# Altium PCB PCB_RAM_MUX4.PcbDoc
Units mil, origin at the board's own origin, x right, y up, seen from the top; angles counter-clockwise.
Board outline 3440 x 3440 mil, 4 copper layers (Top Signal, PWR, GND, Bottom Signal), stack 23.756 mil thick; 58 components, 70 nets, 308 pads, 107 vias.
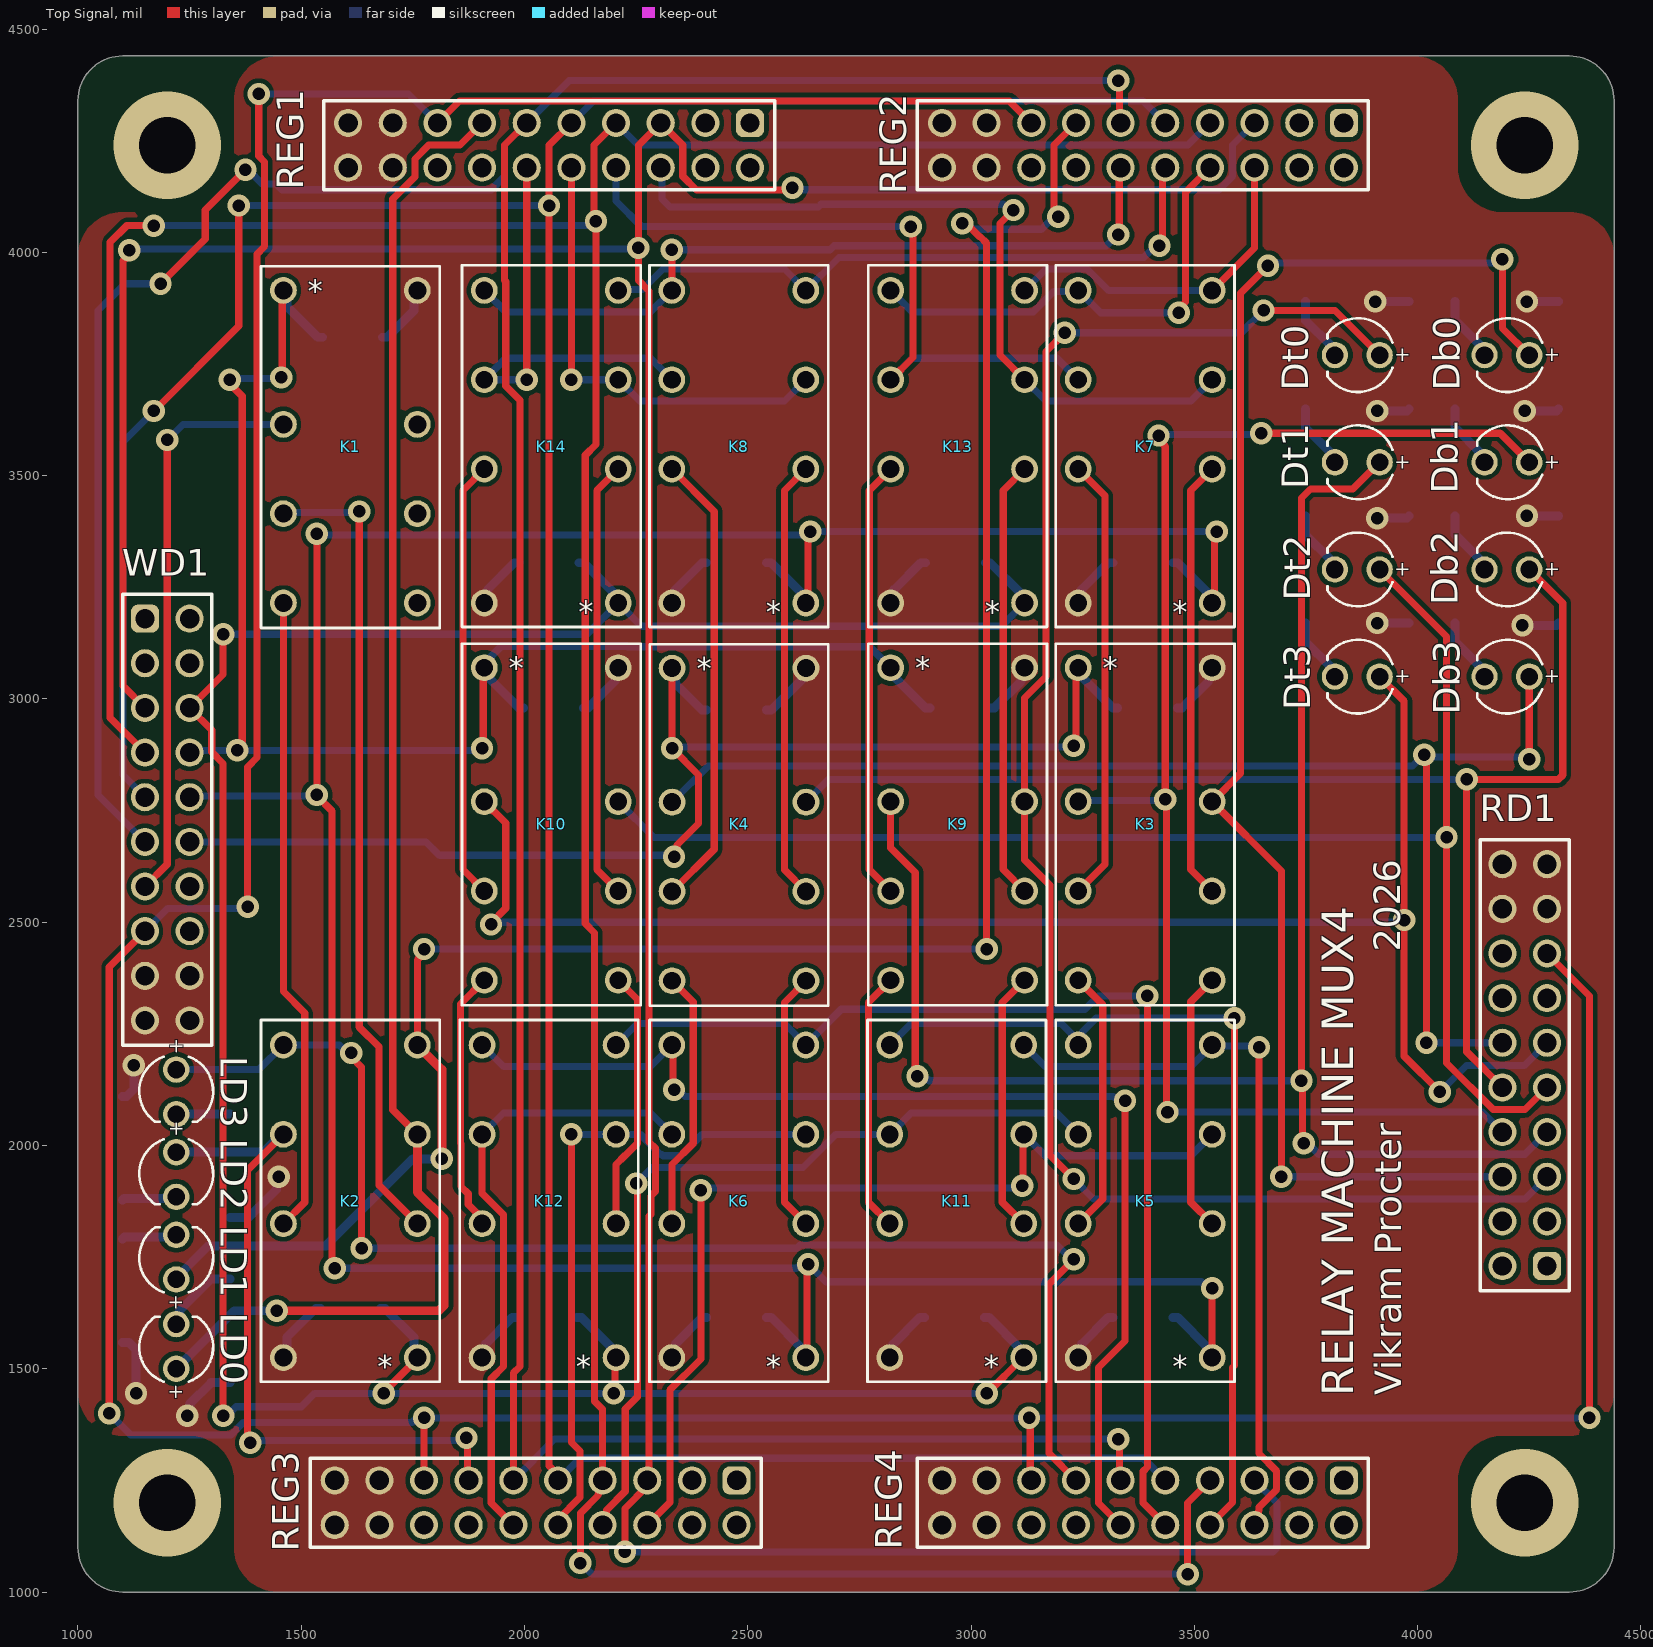
[diagram p0: Top Signal view]
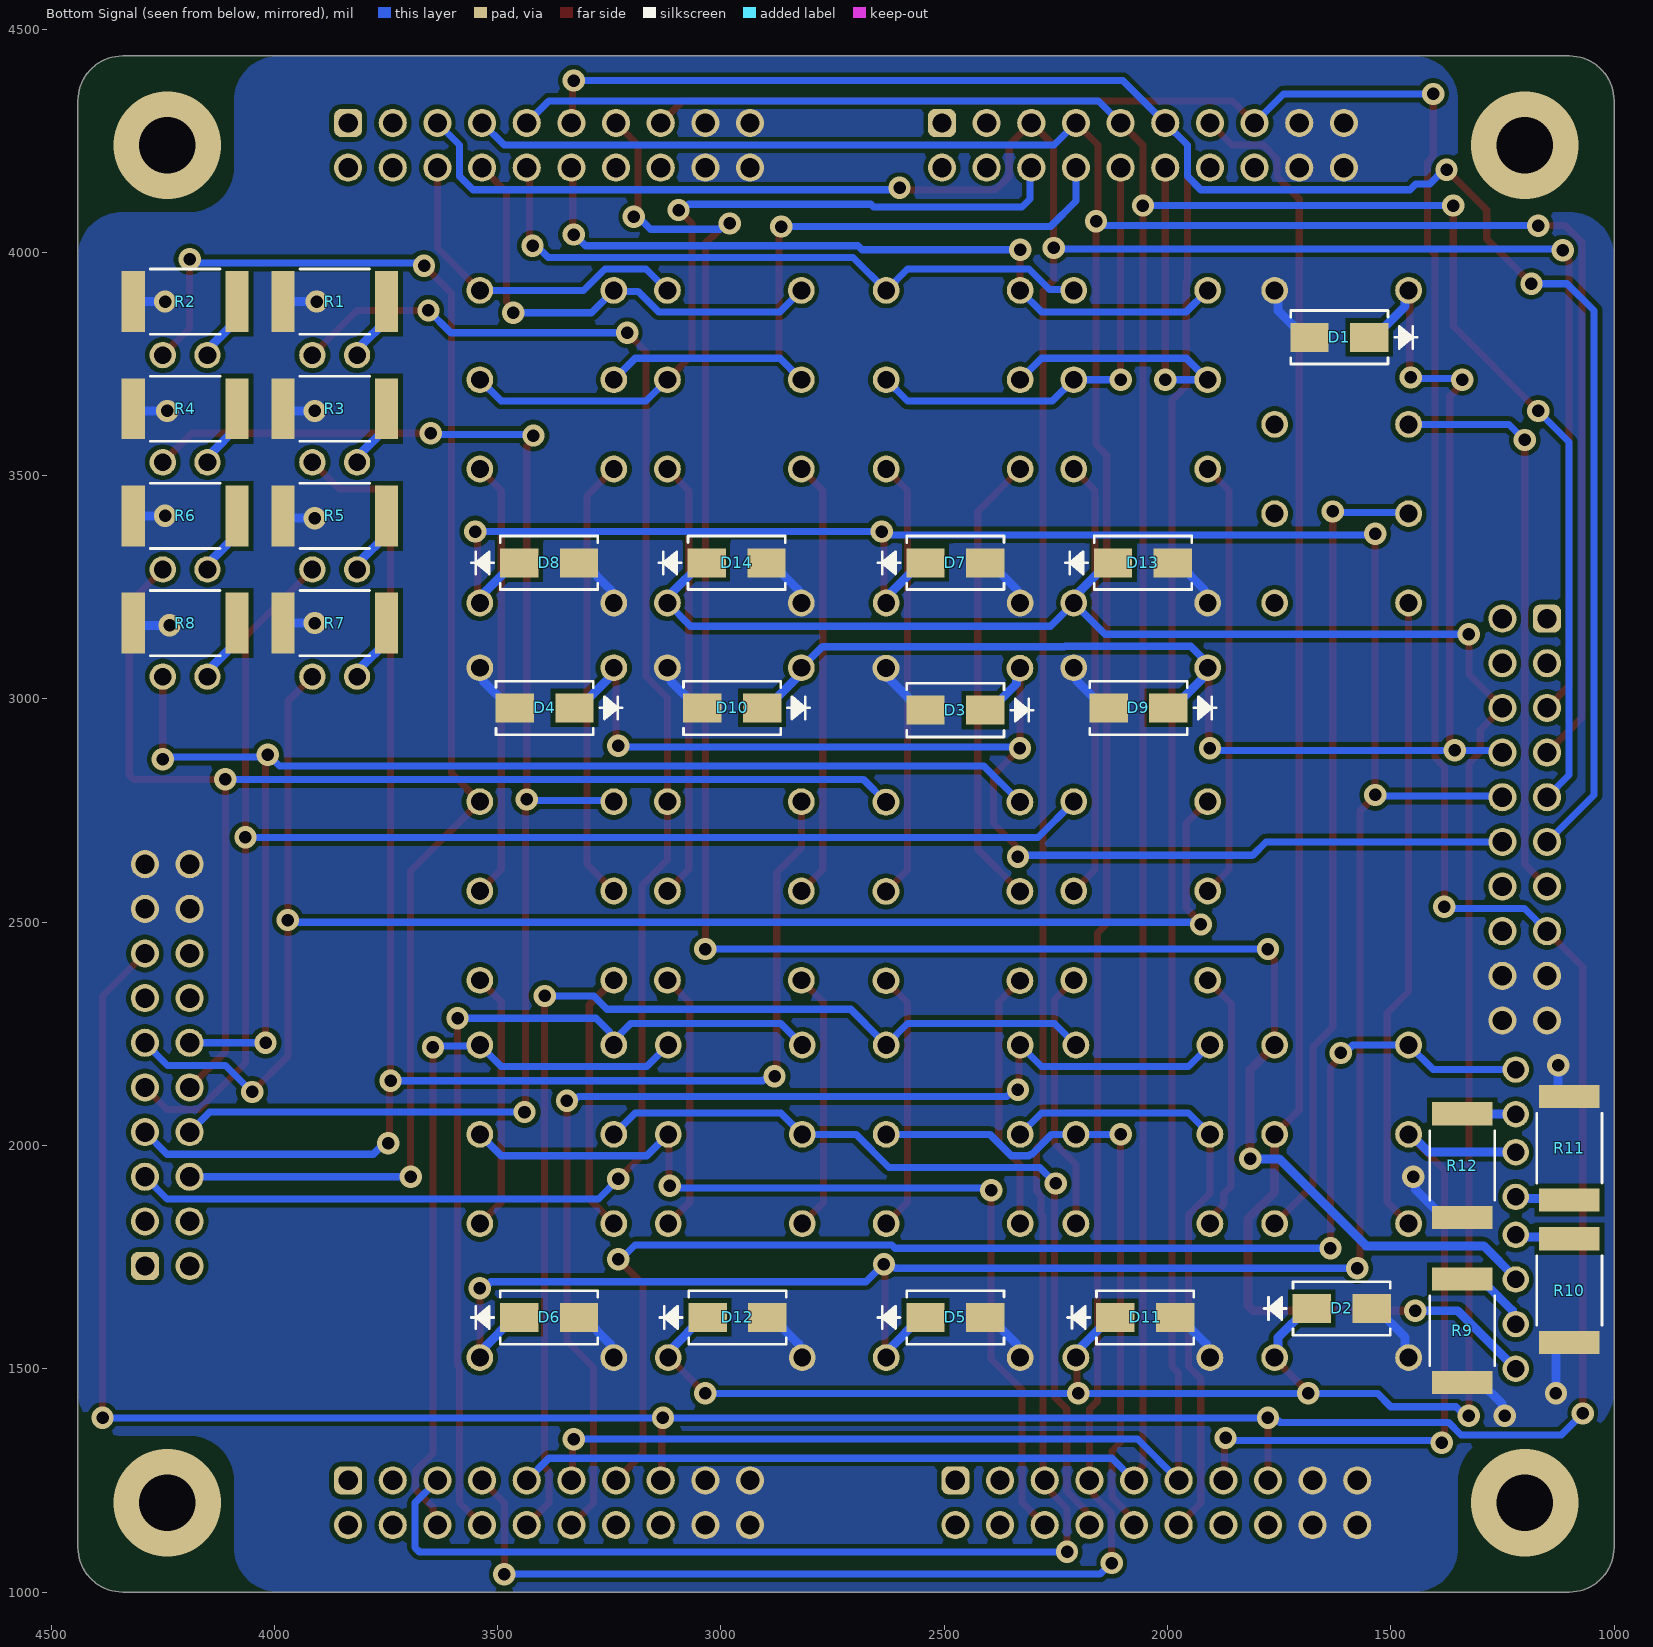
[diagram p1: Bottom Signal view, seen from below]
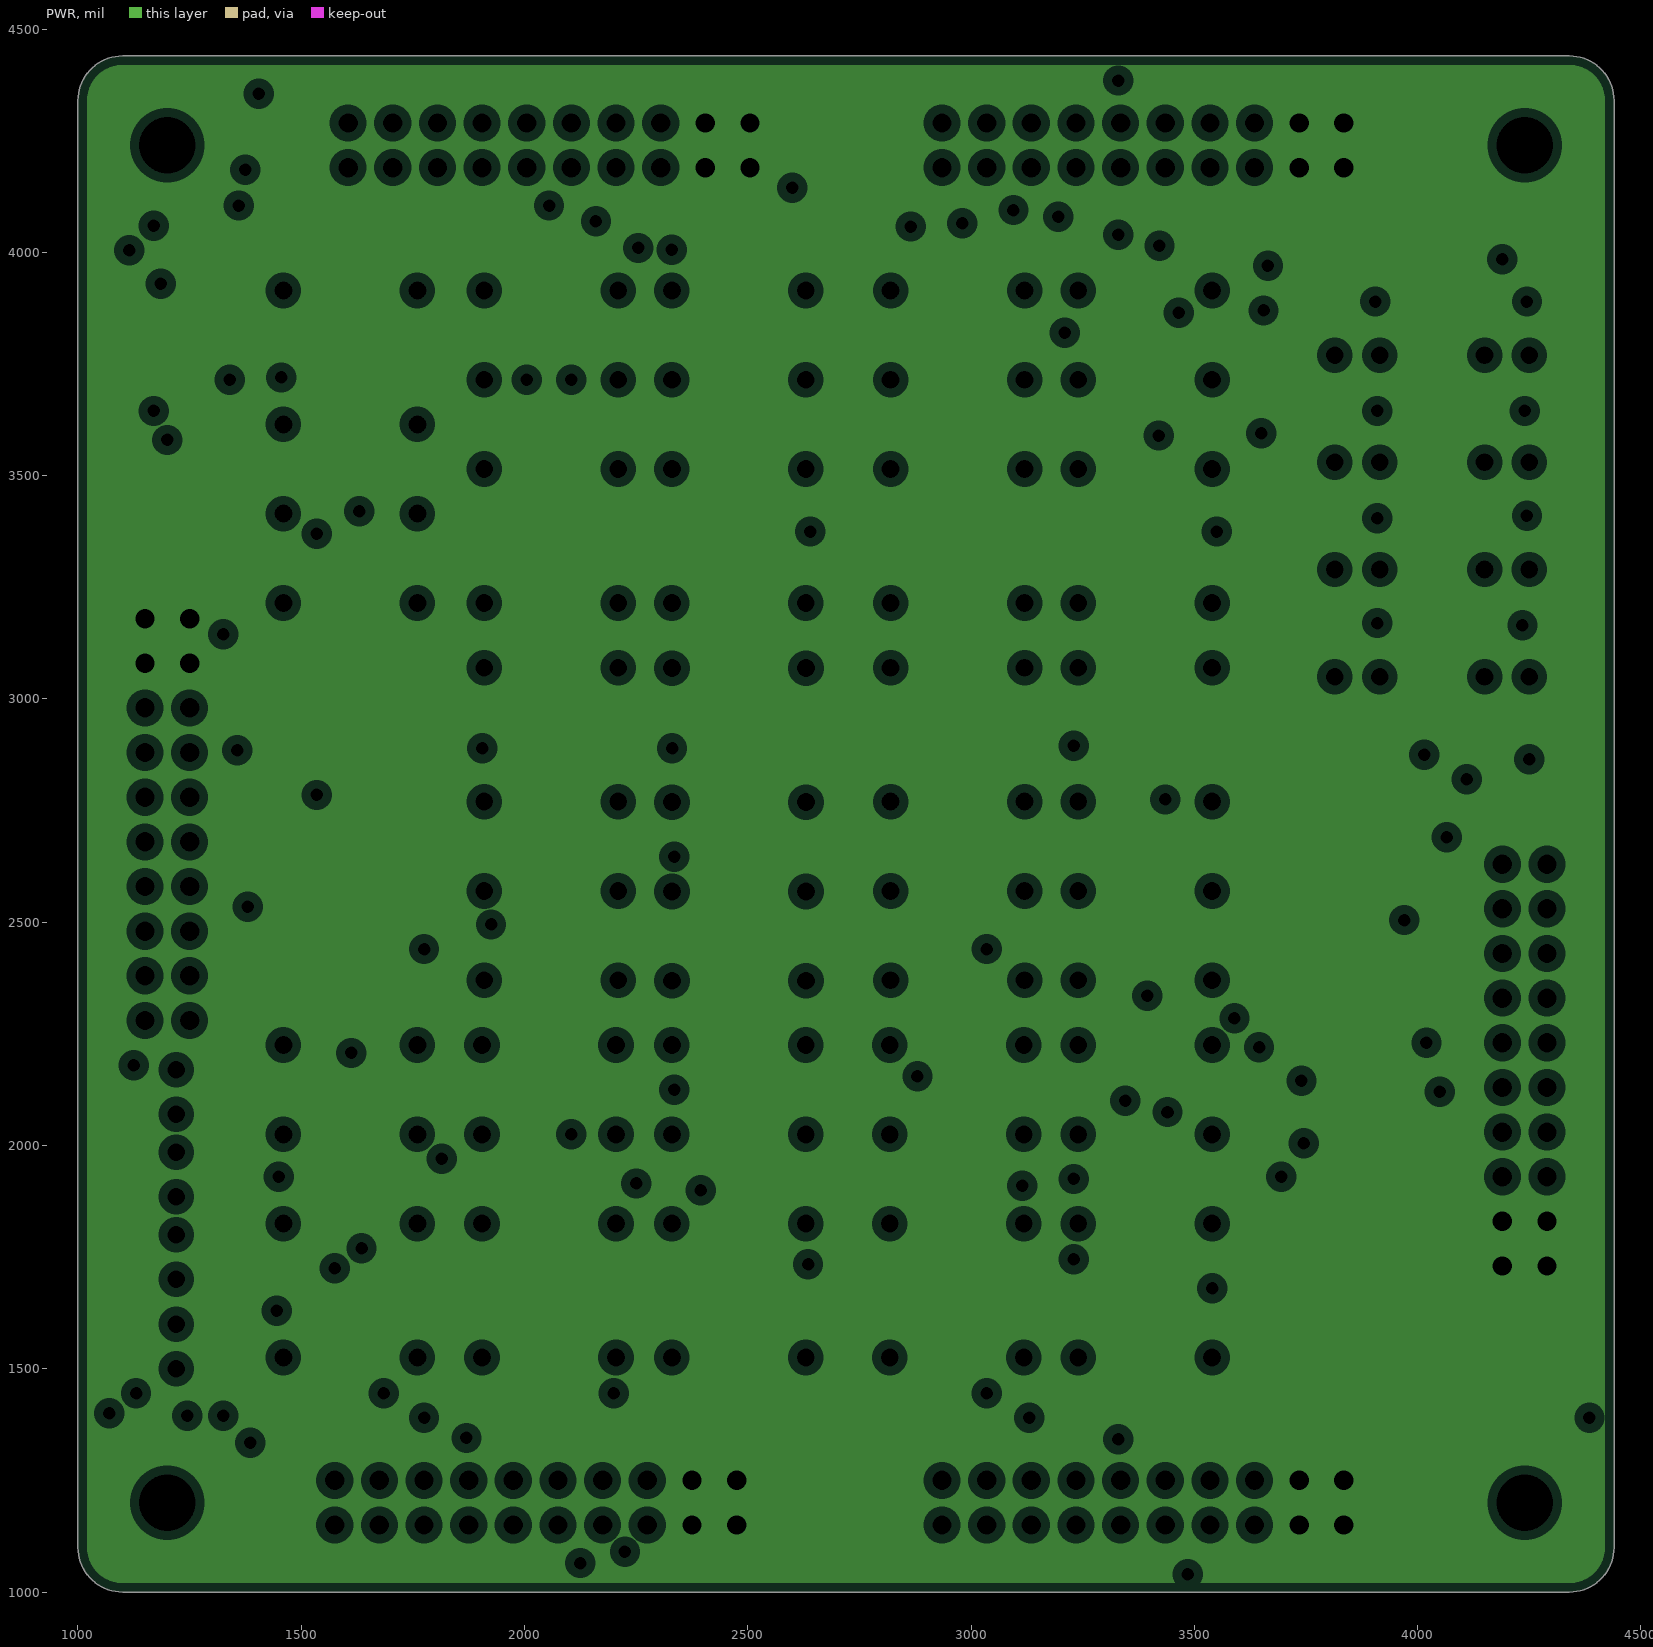
[diagram p2: PWR, clearances drawn from the general rule]
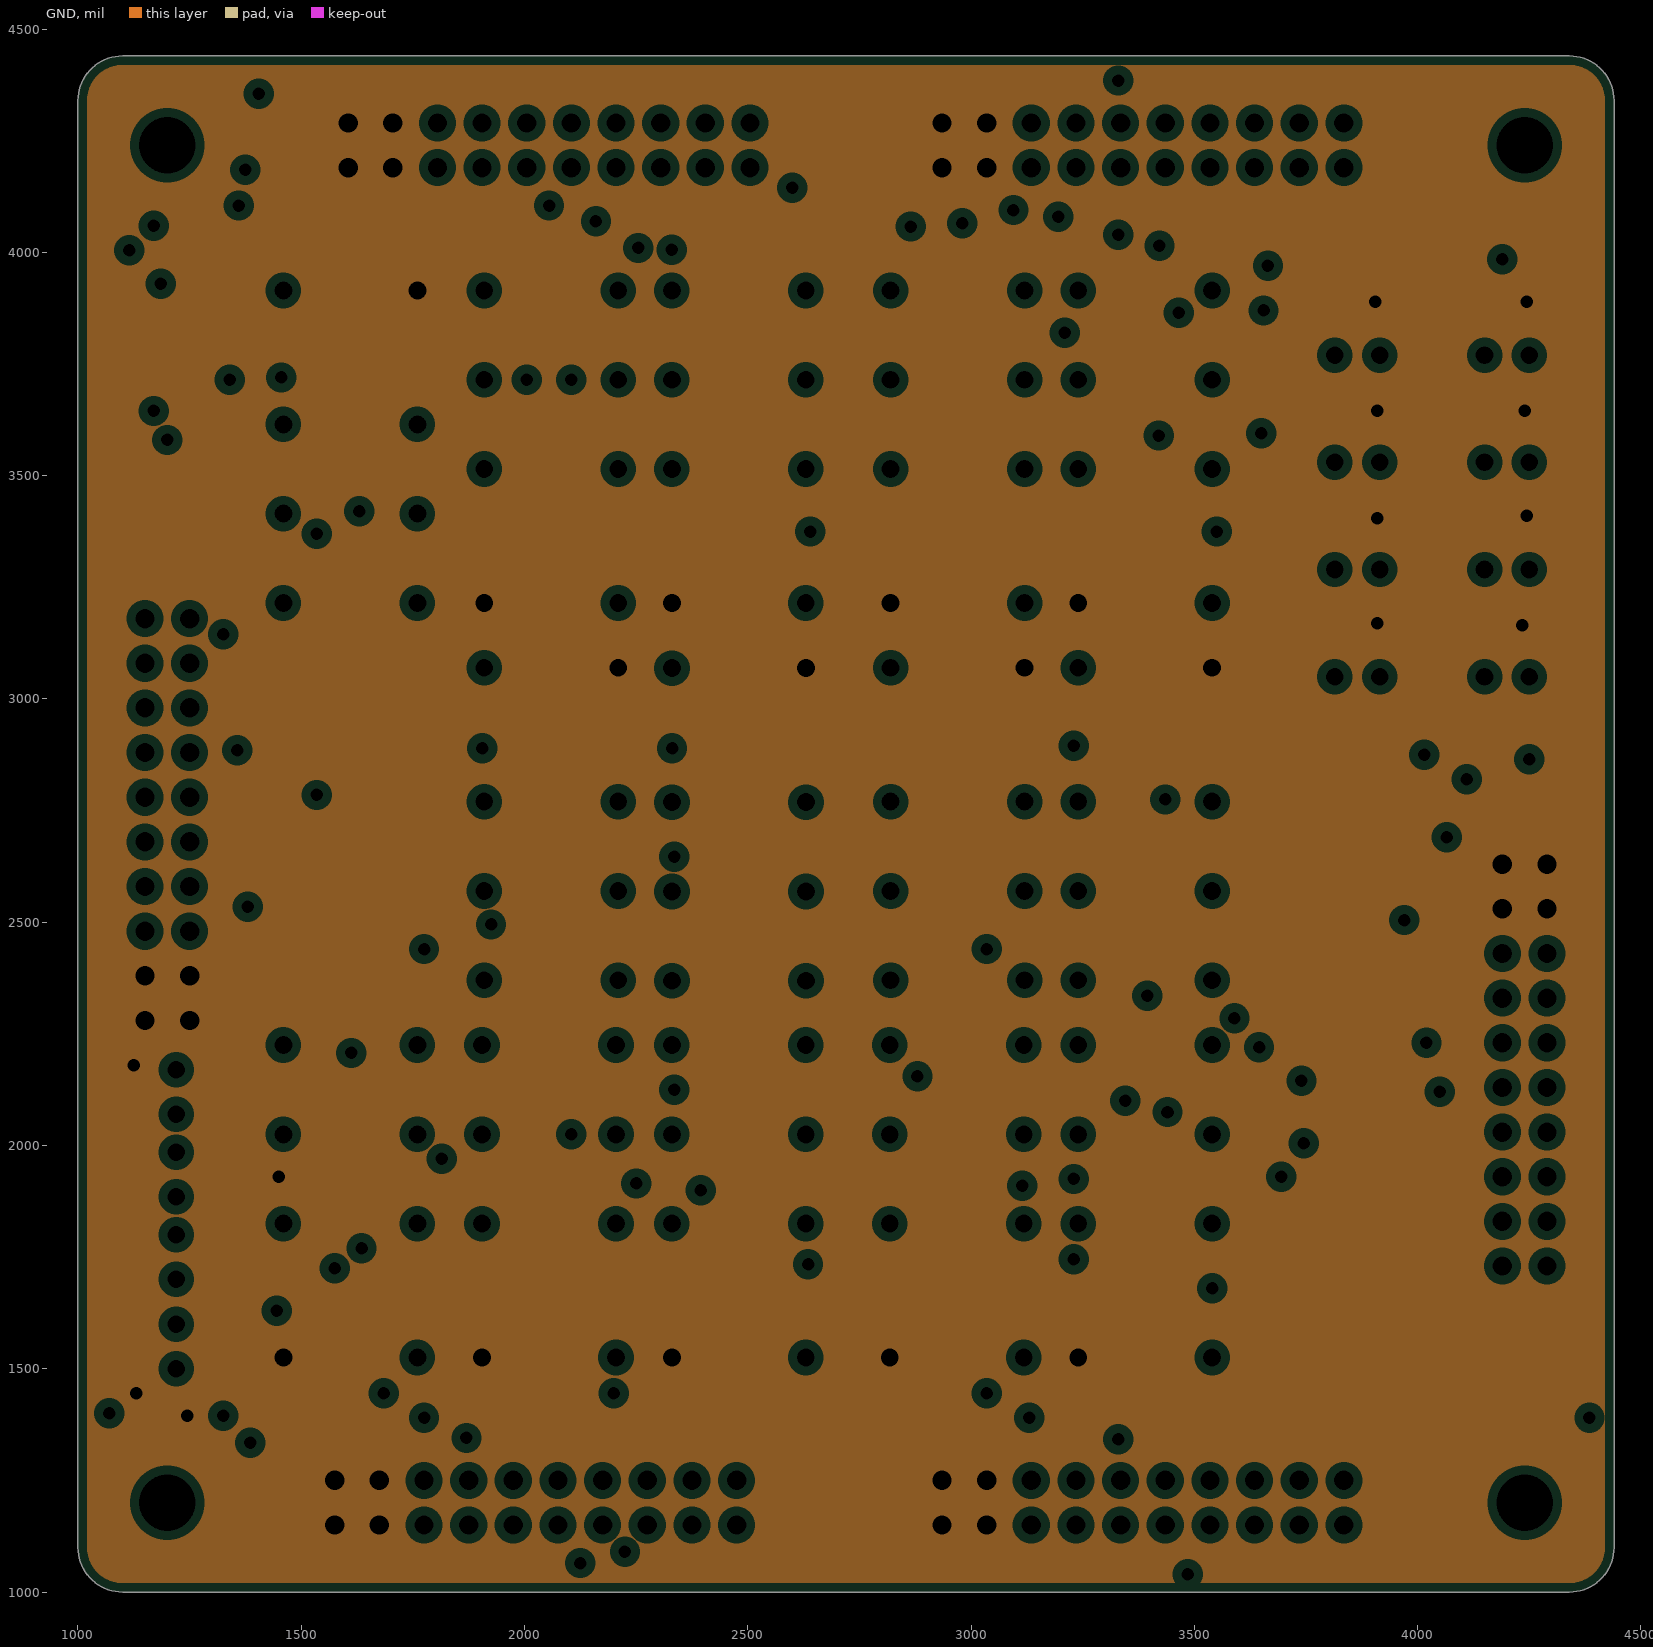
[diagram p3: GND, clearances drawn from the general rule]
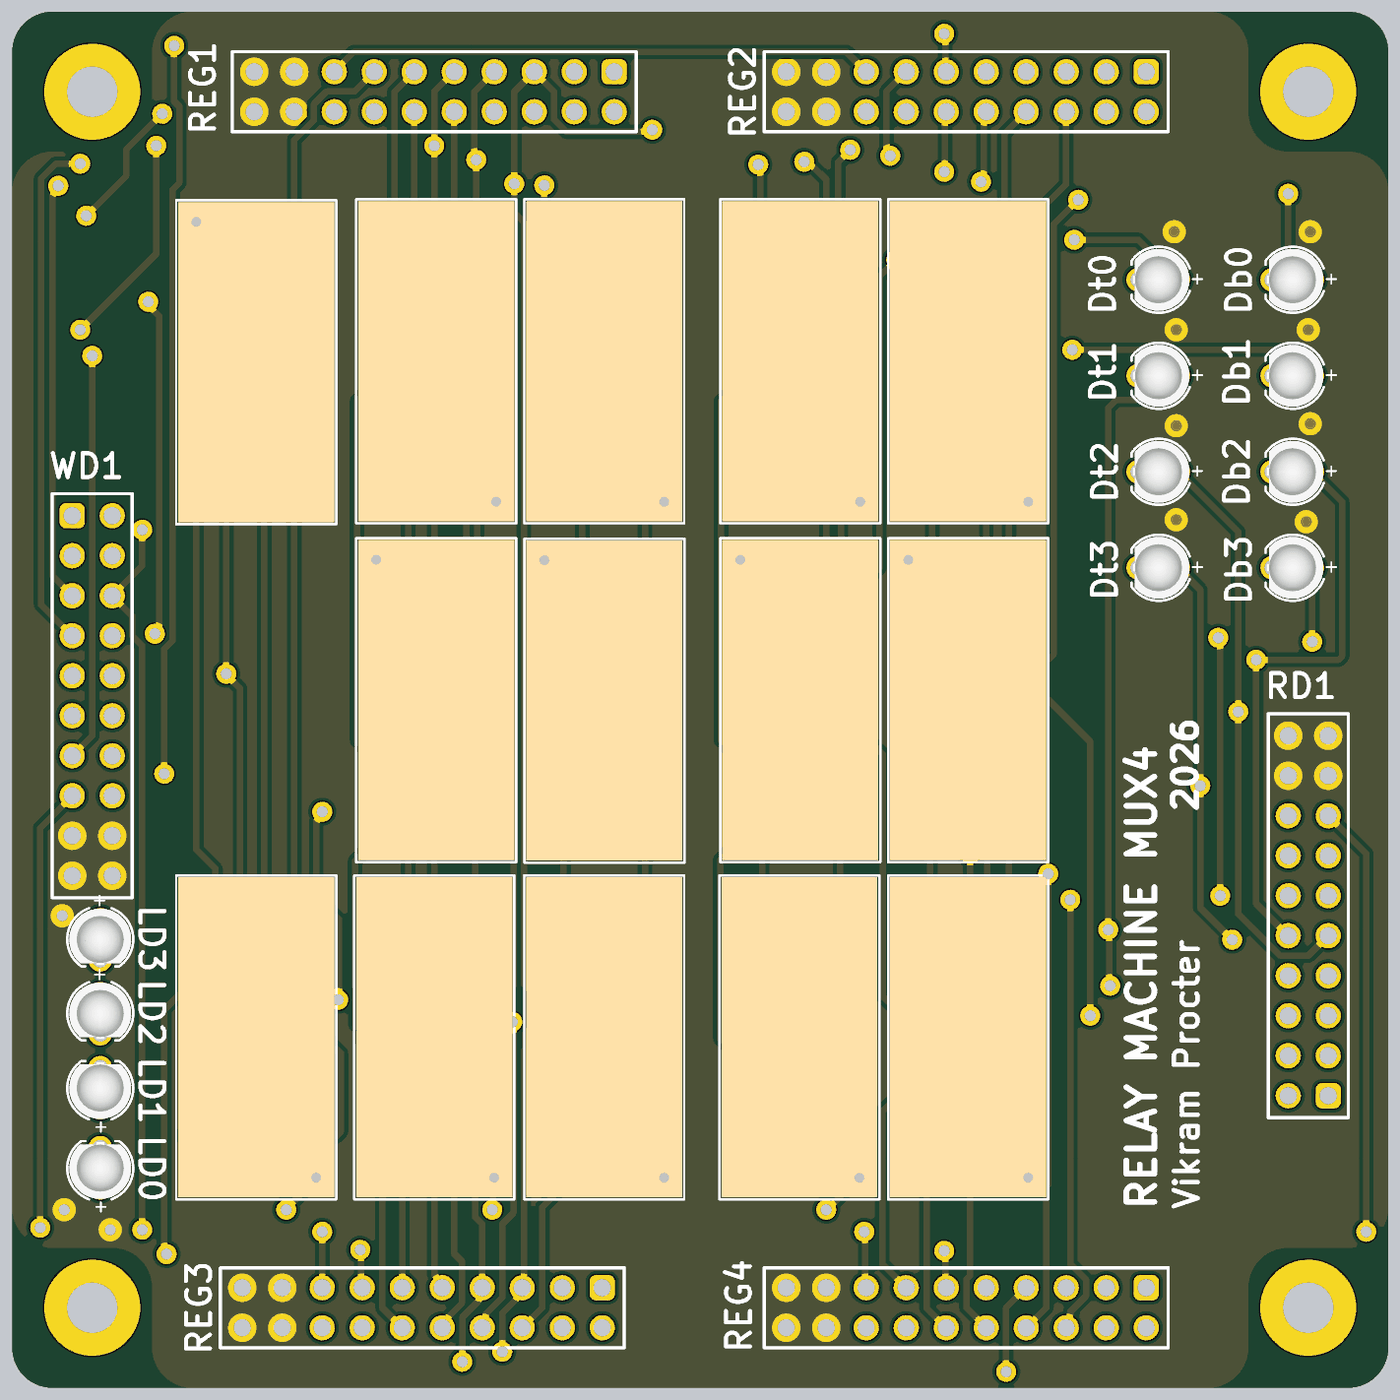
[diagram p4: 3D render of the assembled board from above, using the file's embedded part models]
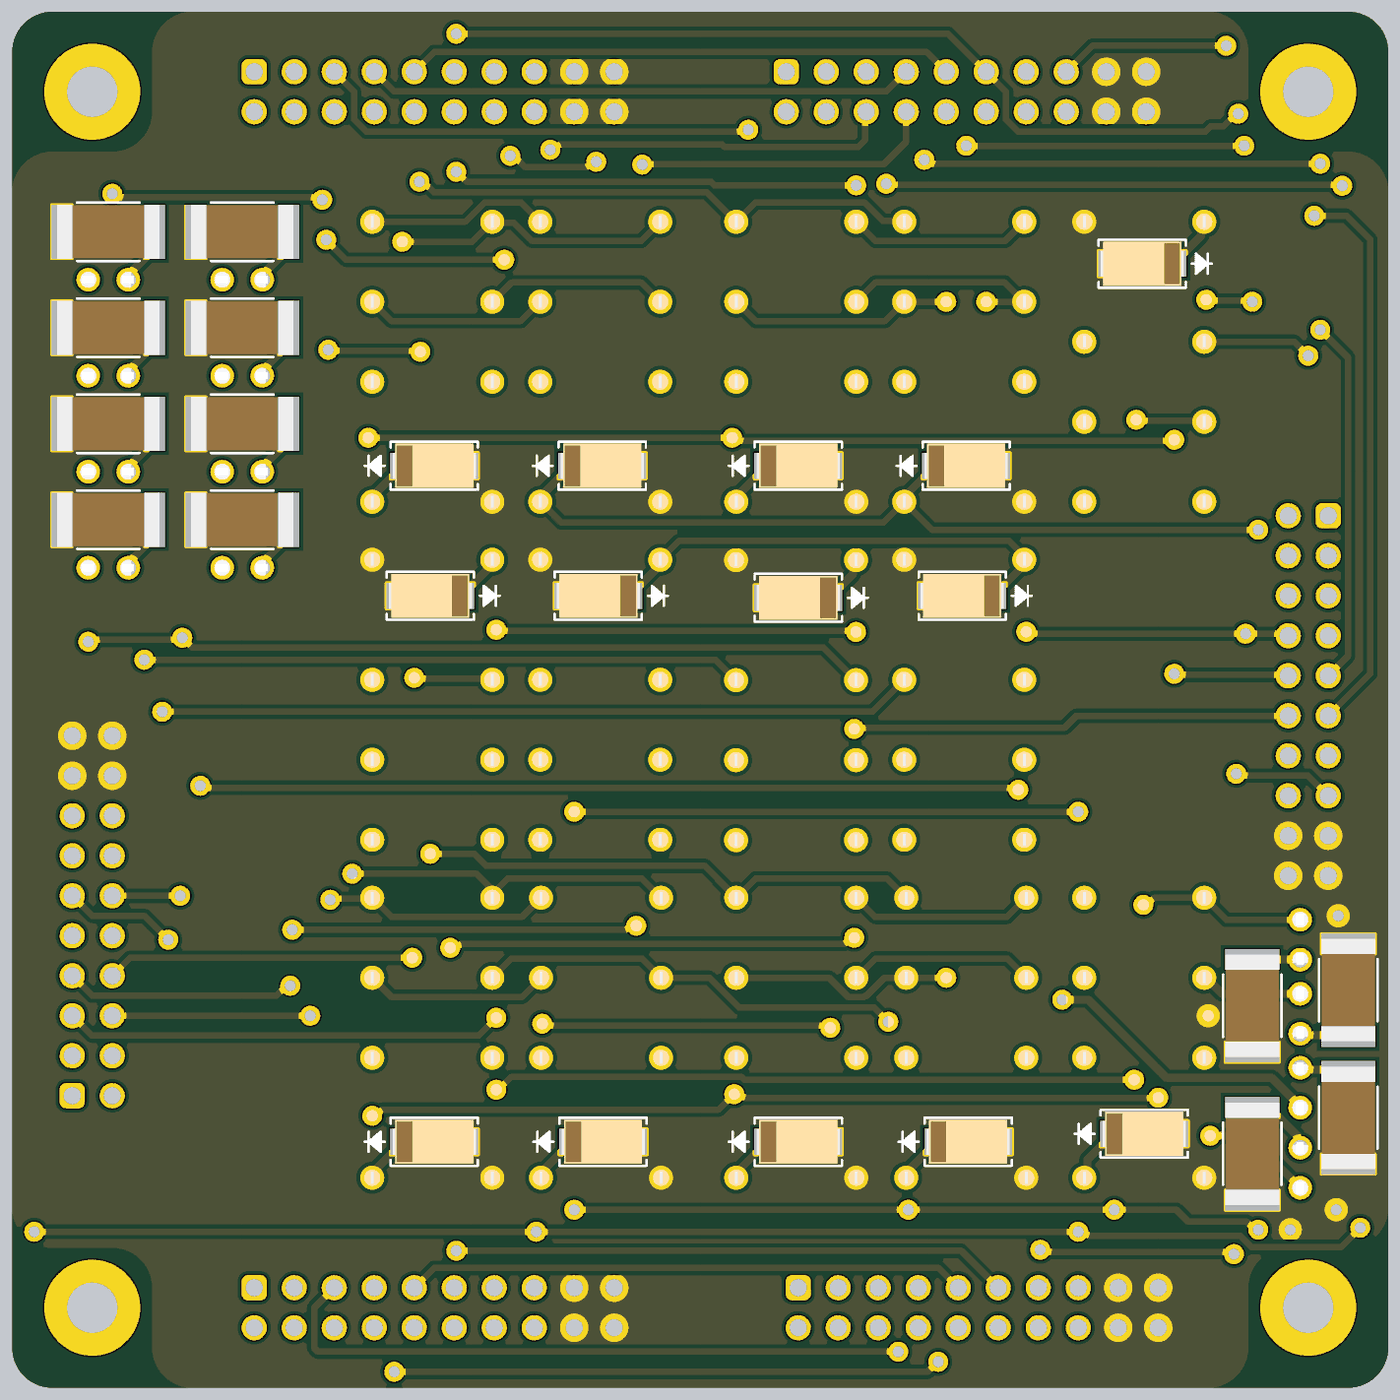
[diagram p5: 3D render of the assembled board from below, using the file's embedded part models]

## Layer stack, top to bottom
Top Solder: solder mask 0.4, Solder Resist, Dk 3.5
Top Signal: signal copper 1.4
Dielectric 2: prepreg 2.8, PP-006, Dk 4.1
PWR: plane copper 1.378, net +24V
Dielectric 1: dielectric 12.6, FR-4, Dk 4.8
GND: plane copper 1.378, net GND
Dielectric 3: prepreg 2.8, PP-006, Dk 4.1
Bottom Signal: signal copper 1.4
Bottom Solder: solder mask 0.4, Solder Resist, Dk 3.5

## Board outline
1000,4340 cw(c1100,4340) 1100,4440 4340,4440 cw(c4340,4340) 4440,4340 4440,1100 cw(c4340,1100) 4340,1000 1100,1000 cw(c1100,1100) 1000,1100 1000,2825

## Design rules (kind name [scope] priority, off if disabled: settings)
Clearance [All] p1: gap=10 ignorepadtopadclearanceinfootprint=FALSE
HoleSize [All] p1: absolutevalues=TRUE maxlimit=240 minlimit=12 maxpercent=80.000 minpercent=20.000
PlaneClearance [All] p1: clearance=20
PlaneConnect [All] p1: planeconnectstyle=Direct reliefexpansion=20 reliefentries=4 reliefconductorwidth=10 reliefairgap=10
PolygonConnect [All] p1: connectstyle=Direct reliefconductorwidth=10 reliefentries=4 polygonreliefangle="90 Angle" airgapwidth=10
RoutingVias [All] p1: holewidth=28 width=50 viastyle="Through Hole" minholewidth=28 minwidth=50 maxholewidth=28 maxwidth=50
SolderMaskExpansion [All] p1: expansion=4 istentingtop=FALSE
SupplyNets "Schematic Supply Nets_1" [InNet('GND')] p1: voltage=0.000
SupplyNets "Schematic Supply Nets" [InNet('+24V')] p2: voltage=0.000
Width [All] p1: maxlimit=50 minlimit=10 preferedwidth=15
27 further rules are at their usual default settings.

## Classes and differential pairs
channel class 4bitMux2_flipped: U_4bitMux21 U_4bitMux22 U_4bitMux23 U_4bitMux24 U_4bitMux25 U_4bitMux26
component class U_4bitMux26: D13 D14 K13 K14
component class U_4bitMux25: D11 D12 K11 K12
component class U_4bitMux24: D9 D10 K9 K10
component class U_4bitMux23: D7 D8 K7 K8
component class U_4bitMux22: D5 D6 K5 K6
component class U_4bitMux21: D3 D4 K3 K4
component class U_4bitDecoder: D1 D2 K1 K2
component class RAM_MUX4_top: Db0 Db1 Db2 Db3 Dt0 Dt1 Dt2 Dt3 LD0 LD1 LD2 LD3 R1 R2 R3 R4 R5 R6 R7 R8 R9 R10 R11 R12 RD1 REG1 REG2 REG3 REG4 WD1

## Components (designator, comment, footprint, x,y, rotation, side; value= is the part's Value field where it differs from the comment)
D1 "SMAJ24A" "DI SMAJ24A" 1615,3810 r0 bottom value=650pF (schematic designator D?)
D2 "SMAJ24A" "DI SMAJ24A" 1610,1635 r180 bottom value=650pF (schematic designator D?)
D3 "SMAJ24A" "DI SMAJ24A" 2475,2975 r0 bottom value=650pF (schematic designator D)
D4 "SMAJ24A" "DI SMAJ24A" 3395,2980 r0 bottom value=650pF (schematic designator D)
D5 "SMAJ24A" "DI SMAJ24A" 2475,1615 r180 bottom value=650pF (schematic designator D)
D6 "SMAJ24A" "DI SMAJ24A" 3385,1615 r180 bottom value=650pF (schematic designator D)
D7 "SMAJ24A" "DI SMAJ24A" 2475,3305 r180 bottom value=650pF (schematic designator D)
D8 "SMAJ24A" "DI SMAJ24A" 3385,3305 r180 bottom value=650pF (schematic designator D)
D9 "SMAJ24A" "DI SMAJ24A" 2065,2980 r0 bottom value=650pF (schematic designator D)
D10 "SMAJ24A" "DI SMAJ24A" 2975,2980 r0 bottom value=650pF (schematic designator D)
D11 "SMAJ24A" "DI SMAJ24A" 2050,1615 r180 bottom value=650pF (schematic designator D)
D12 "SMAJ24A" "DI SMAJ24A" 2963,1615 r180 bottom value=650pF (schematic designator D)
D13 "SMAJ24A" "DI SMAJ24A" 2055,3305 r180 bottom value=650pF (schematic designator D)
D14 "SMAJ24A" "DI SMAJ24A" 2965,3305 r180 bottom value=650pF (schematic designator D)
Db0 "RED" "LED RED 151051RS11000" 4200,3770 r180 top
Db1 "RED" "LED RED 151051RS11000" 4200,3530 r180 top
Db2 "RED" "LED RED 151051RS11000" 4200,3290 r180 top
Db3 "RED" "LED RED 151051RS11000" 4200,3050 r180 top
Dt0 "RED" "LED RED 151051RS11000" 3865,3770 r180 top
Dt1 "RED" "LED RED 151051RS11000" 3865,3530 r180 top
Dt2 "RED" "LED RED 151051RS11000" 3865,3290 r180 top
Dt3 "RED" "LED RED 151051RS11000" 3865,3050 r180 top
K1 "J104D2C24VDC.15S" "Relay J104D2C24VDC.15S" 1460,3915 r0 top (schematic designator K?)
K2 "J104D2C24VDC.15S" "Relay J104D2C24VDC.15S" 1760,1525 r180 top (schematic designator K?)
K3 "J104D2C24VDC.15S" "Relay J104D2C24VDC.15S" 3240,3070 r0 top (schematic designator K)
K4 "J104D2C24VDC.15S" "Relay J104D2C24VDC.15S" 2330.48,3069.01 r0 top (schematic designator K)
K5 "J104D2C24VDC.15S" "Relay J104D2C24VDC.15S" 3540,1525 r180 top (schematic designator K)
K6 "J104D2C24VDC.15S" "Relay J104D2C24VDC.15S" 2630,1525 r180 top (schematic designator K)
K7 "J104D2C24VDC.15S" "Relay J104D2C24VDC.15S" 3540,3215 r180 top (schematic designator K)
K8 "J104D2C24VDC.15S" "Relay J104D2C24VDC.15S" 2630,3215 r180 top (schematic designator K)
K9 "J104D2C24VDC.15S" "Relay J104D2C24VDC.15S" 2820,3070 r0 top (schematic designator K)
K10 "J104D2C24VDC.15S" "Relay J104D2C24VDC.15S" 1910,3070 r0 top (schematic designator K)
K11 "J104D2C24VDC.15S" "Relay J104D2C24VDC.15S" 3118,1525 r180 top (schematic designator K)
K12 "J104D2C24VDC.15S" "Relay J104D2C24VDC.15S" 2205,1525 r180 top (schematic designator K)
K13 "J104D2C24VDC.15S" "Relay J104D2C24VDC.15S" 3120,3215 r180 top (schematic designator K)
K14 "J104D2C24VDC.15S" "Relay J104D2C24VDC.15S" 2210,3215 r180 top (schematic designator K)
LD0 "RED" "LED RED 151051RS11000" 1220,1550 r90 top
LD1 "RED" "LED RED 151051RS11000" 1220,1750 r90 top
LD2 "RED" "LED RED 151051RS11000" 1220,1935 r270 top
LD3 "RED" "LED RED 151051RS11000" 1220,2120 r270 top
R1 "1.3k" "RES 2512" 3865,3890 r0 bottom value=1.3kΩ
R2 "1.3k" "RES 2512" 4200,3890 r0 bottom value=1.3kΩ
R3 "1.3k" "RES 2512" 3865,3650 r0 bottom value=1.3kΩ
R4 "1.3k" "RES 2512" 4200,3650 r0 bottom value=1.3kΩ
R5 "1.3k" "RES 2512" 3865,3410 r0 bottom value=1.3kΩ
R6 "1.3k" "RES 2512" 4200,3410 r0 bottom value=1.3kΩ
R7 "1.3k" "RES 2512" 3865,3170 r0 bottom value=1.3kΩ
R8 "1.3k" "RES 2512" 4200,3170 r0 bottom value=1.3kΩ
R9 "1.3k" "RES 2512" 1340,1585 r270 bottom value=1.3kΩ
R10 "1.3k" "RES 2512" 1100,1675 r270 bottom value=1.3kΩ
R11 "1.3k" "RES 2512" 1100,1994 r90 bottom value=1.3kΩ
R12 "1.3k" "RES 2512" 1340,1955 r270 bottom value=1.3kΩ
RD1 "Con 2.54mm 10x2pos" "Con 2.54mm 10x2pos" 4240,2180 r90 top (schematic designator RD)
REG1 "Con 2.54mm 10x2pos" "Con 2.54mm 10x2pos" 2055,4240 r180 top (schematic designator REG0)
REG2 "Con 2.54mm 10x2pos" "Con 2.54mm 10x2pos" 3385,4240 r180 top (schematic designator REG1)
REG3 "Con 2.54mm 10x2pos" "Con 2.54mm 10x2pos" 2025,1200 r180 top (schematic designator REG2)
REG4 "Con 2.54mm 10x2pos" "Con 2.54mm 10x2pos" 3385,1200 r180 top (schematic designator REG3)
WD1 "Con 2.54mm 10x2pos" "Con 2.54mm 10x2pos" 1200,2730 r270 top (schematic designator WD)

## Footprints (in the part's own frame and the unit in brackets; to place one, negate y for a bottom-side part, rotate by r counter-clockwise, add the part's x,y. Pads: shape width x height; smd on the part's side, far side on the other; paste and mask are expansions set on the pad)
"Con 2.54mm 10x2pos" [mm]
  rrect50% 1.6x1.6 hole 1.1: 1(-11.43,-1.27)
  round 1.6 hole 1.1: 2(-11.43,1.27) 3(-8.89,-1.27) 4(-8.89,1.27) 5(-6.35,-1.27) 6(-6.35,1.27) 7(-3.81,-1.27) 8(-3.81,1.27) 9(-1.27,-1.27) 10(-1.27,1.27) 11(1.27,-1.27) 12(1.27,1.27) 13(3.81,-1.27) 14(3.81,1.27) 15(6.35,-1.27) 16(6.35,1.27) 17(8.89,-1.27) 18(8.89,1.27) 19(11.43,-1.27) 20(11.43,1.27)
  silkscreen extent -12.83,-2.54 12.83,2.54
"DI SMAJ24A" [mil]
  rect 86x65 smd paste+0 mask+4: 1(-67,0) 2(67,0)
  silkscreen extent -174,-60 109,60, body extent -104,-55 104,55, height 92
"LED RED 151051RS11000" [mm]
  round 1.5 hole 1: 1(-1.27,0) 2(1.27,0)
  silkscreen extent -2,-2.1 1.69,2.1, body extent -1.99,-1.97 1.63,1.97, height 5.35
"Relay J104D2C24VDC.15S" [mil]
  round 60 hole 40 paste-99999 mask+0: 1(0,0) 2(0,-300) 3(0,-500) 4(0,-700) 5(300,-700) 6(300,-500) 7(300,-300) 8(300,0)
  silkscreen extent -50,-756 350,54, body extent -45,-751 345,49, height 450
"RES 2512" [mil]
  rect 52x136 smd paste+0 mask+3: 1(-116,0) 2(116,0)
  silkscreen extent -78,-73 78,73, body extent -128,-68 128,68, height 28

## Part data
D1 D2 D3 D4 D5 D6 D7 D8 D9 D10 D11 D12 D13 D14: library part "DI SMAJ24A", "SMAJ Series 400 W 24 V Uni-Directional Surface Mount TVS Diode - DO-214AC", Breakdown Voltage=28.1V, Case/Package=SMA, Clamping Voltage=38.9V, Forward Voltage=3.5V, Leakage Current=1µA, Manufacturer=Littelfuse, Max Breakdown Voltage=29.5V, Max Junction Temperature (Tj)=150°C, Max Output current=10.3A, Max Power Dissipation=3.3W, Min Breakdown Voltage=26.7V, Min Operating Temperature=-65°C, Operating Supply Voltage=24V, Peak Pulse Power=400W, Power Line Protection=No, Supplier Part Number=SMAJ24ALFCT-ND, Test Current=1mA, Category="TVS Diodes", China RoHS=Non-Compliant, ComponentLink1Description=https://datasheet.octopart.com:443/SMAJ24A-Littelfuse-datasheet-150463581.pdf?src-supplier=Farnell, ComponentLink1URL=https://datasheet.octopart.com:443/SMAJ24A-Littelfuse-datasheet-150463581.pdf?src-supplier=Farnell, ComponentLink2Description=https://datasheet.octopart.com:443/SMAJ24A-Littelfuse-datasheet-63710798.pdf?src-supplier=element14+APAC, ComponentLink2URL=https://datasheet.octopart.com:443/SMAJ24A-Littelfuse-datasheet-63710798.pdf?src-supplier=element14+APAC, ComponentLink3Description=https://datasheet.octopart.com:443/SMAJ24A-Littelfuse-datasheet-11547152.pdf?src-supplier=element14+APAC, ComponentLink3URL=https://datasheet.octopart.com:443/SMAJ24A-Littelfuse-datasheet-11547152.pdf?src-supplier=element14+APAC, ComponentLink4Description=https://datasheet.octopart.com:443/SMAJ24A-Littelfuse-datasheet-5393952.pdf?src-supplier=element14+APAC, ComponentLink4URL=https://datasheet.octopart.com:443/SMAJ24A-Littelfuse-datasheet-5393952.pdf?src-supplier=element14+APAC, ComponentLink5Description=https://datasheet.octopart.com:443/SMAJ24A-Littelfuse-datasheet-511791.pdf?src-supplier=element14+APAC, ComponentLink5URL=https://datasheet.octopart.com:443/SMAJ24A-Littelfuse-datasheet-511791.pdf?src-supplier=element14+APAC, ComponentLink6Description=https://datasheet.octopart.com:443/SMAJ24A-Littelfuse-datasheet-164649624.pdf?src-supplier=JRH+Electronics, ComponentLink6URL=https://datasheet.octopart.com:443/SMAJ24A-Littelfuse-datasheet-164649624.pdf?src-supplier=JRH+Electronics, ComponentLink7Description=https://datasheet.octopart.com:443/SMAJ24A-Littelfuse-datasheet-38878911.pdf?src-supplier=RS+(Formerly+Allied+Electronics), ComponentLink7URL=https://datasheet.octopart.com:443/SMAJ24A-Littelfuse-datasheet-38878911.pdf?src-supplier=RS+(Formerly+Allied+Electronics), ComponentLink8Description=https://datasheet.octopart.com:443/SMAJ24A-Littelfuse-datasheet-17901671.pdf?src-supplier=Future+Electronics, ComponentLink8URL=https://datasheet.octopart.com:443/SMAJ24A-Littelfuse-datasheet-17901671.pdf?src-supplier=Future+Electronics, ComponentLink9Description=https://datasheet.octopart.com:443/SMAJ24A-Littelfuse-datasheet-1053.pdf?src-supplier=DigiKey, ComponentLink9URL=https://datasheet.octopart.com:443/SMAJ24A-Littelfuse-datasheet-1053.pdf?src-supplier=DigiKey, Composition=Zener, Direction=Unidirectional, Element Configuration=Single, Height=2.29mm, Lead Free="Lead Free", Length=4.5mm, Lifecycle Status=Production, Manufacturer Part Number=SMAJ24A, Max Operating Temperature=150°C, Max Reverse Leakage Current=1µA, Max Surge Current=10.3A, Mounting Technology="Surface Mount", Number of Channels=1, Number of Elements=1, Number of Terminals=2, Number of Unidirectional Channels=1, Packaging="Tape & Reel", Peak Pulse Current=10.3A, Peak Reverse Current=1µA, Pins=2, Polarity=Unidirectional, Power Dissipation=400W, Power Rating=400W, Pricing="1=0.21, 10=0.113, 100=0.074, 500=0.072, 1000=0.071 (USD)", Radiation Hardening=No, REACH SVHC=No, Reverse Breakdown Voltage=26.7V, Reverse Standoff Voltage=24V, Reverse Voltage=24V, RoHS=Compliant, Schedule B="8541100080, 8541100080|8541100080|8541100080|8541100080|8541100080", Stock=97583, Supplier=DigiKey, Termination=SMD/SMT, Voltage Rating (DC)=24V, Width=2.79mm
Db0 Db1 Db2 Db3 Dt0 Dt1 Dt2 Dt3 LD0 LD1 LD2 LD3: library part "LED RED 151051RS11000", "WL-TMRC Red Color Diffused 5 mm Round Through Hole LED", Case/Package=Radial, Color=Red, Forward Current=100mA, Forward Voltage=2.1V, Manufacturer="Wurth Elektronik", Manufacturer Part Number=151051RS11000, Max Operating Temperature=85°C, Max Reverse Voltage (DC)=5V, Min Operating Temperature=-40°C, Supplier Part Number=732-5016-ND, Test Current=20mA, Category=LEDs, ComponentLink1Description=https://datasheet.octopart.com:443/151051RS11000-Wurth-Elektronik-datasheet-168474692.pdf?src-supplier=Wurth+Elektronik, ComponentLink1URL=https://datasheet.octopart.com:443/151051RS11000-Wurth-Elektronik-datasheet-168474692.pdf?src-supplier=Wurth+Elektronik, ComponentLink2Description=https://datasheet.octopart.com:443/151051RS11000-W%C3%BCrth-Elektronik-datasheet-83005830.pdf?src-supplier=Future+Electronics, ComponentLink2URL=https://datasheet.octopart.com:443/151051RS11000-W%C3%BCrth-Elektronik-datasheet-83005830.pdf?src-supplier=Future+Electronics, ComponentLink3Description=https://datasheet.octopart.com:443/151051RS11000-W%C3%BCrth-Elektronik-datasheet-15983824.pdf?src-supplier=element14+APAC, ComponentLink3URL=https://datasheet.octopart.com:443/151051RS11000-W%C3%BCrth-Elektronik-datasheet-15983824.pdf?src-supplier=element14+APAC, Dominant Wavelength=645nm, Height=8.6mm, Length=5mm, Lens Size=5mm, Lens Style="Circular, Diffused, Round", Luminous Intensity=30mcd, Mounting Technology="Through Hole", Packaging=Bulk, Peak Wavelength=650nm, Pricing="1=0.15, 50=0.1396, 100=0.1197, 500=0.105 (USD)", REACH SVHC=Unknown, RoHS=Compliant, Stock=19120, Supplier=DigiKey, Viewing Angle=60°, Wavelength=630nm, Width=5mm
K1 K2 K3 K4 K5 K6 K7 K8 K9 K10 K11 K12 K13 K14: library part "Relay J104D2C24VDC.15S", "Relay Ul Gen Purp DPDT 2C 24VDC", Coil Current=6mA, Coil Power=150mW, Coil Resistance=3.84kΩ, Coil Voltage (DC)=18V, Contact Current Rating=2A, Contact Resistance=50mΩ, Contact Voltage Rating (AC)=250V, Insulation Resistance=100MΩ, Manufacturer="CIT Relay & Switch", Max Operating Temperature=85°C, Max Voltage Rating (DC)=100V, Min Operating Temperature=-40°C, Supplier Part Number=2449-J104D2C24VDC.15S-ND, Category="Signal Relays", Contact Plating=Gold, Electrical Life=100kcycles, Height=11.42mm, Length=20.37mm, Manufacturer Part Number=J104D2C24VDC.15S, Max Current Rating=2A, Number of Terminals=8, Pricing="1=1.26, 20=1.082, 40=1.045, 60=1.02383, 100=0.998, 260=0.95115, 500=0.92036, 1000=0.88878, 5000=0.8195 (USD)", Release Time=4ms, Response Time=6ms, Stock=5620, Supplier=DigiKey, Throw Configuration=DPDT
R1 R2 R3 R4 R5 R6 R7 R8 R9 R10 R11 R12: library part "RES 1.3k 2512 1W", "Res Thick Film 2512 1.3K Ohm 1% 1W ±100ppm/C Pad SMD Automotive T/R RMCF2512FT1K30", Case/Package=2512, Manufacturer="Stackpole Electronics", Manufacturer Part Number=RMCF2512FT1K30, Max Operating Temperature=155°C, Max Power Dissipation=1W, Min Operating Temperature=-55°C, Supplier Part Number=RMCF2512FT1K30CT-ND, Temperature Coefficient=100ppm/°C, Tolerance=1%, Voltage Rating=500V, Working Voltage=200V, Category="Chip SMD Resistors", China RoHS=Non-Compliant, ComponentLink1Description=https://datasheet.octopart.com:443/RMCF2512FT1K30-Stackpole-Electronics-datasheet-182148065.pdf?src-supplier=IHS, ComponentLink1URL=https://datasheet.octopart.com:443/RMCF2512FT1K30-Stackpole-Electronics-datasheet-182148065.pdf?src-supplier=IHS, ComponentLink2Description=https://datasheet.octopart.com:443/RMCF2512FT1K30-Stackpole-Electronics-datasheet-28504820.pdf?src-supplier=Future+Electronics, ComponentLink2URL=https://datasheet.octopart.com:443/RMCF2512FT1K30-Stackpole-Electronics-datasheet-28504820.pdf?src-supplier=Future+Electronics, ComponentLink3Description=https://datasheet.octopart.com:443/RMCF2512FT1K30-Stackpole-Electronics-datasheet-141193804.pdf?src-supplier=Master+Electronics, ComponentLink3URL=https://datasheet.octopart.com:443/RMCF2512FT1K30-Stackpole-Electronics-datasheet-141193804.pdf?src-supplier=Master+Electronics, ComponentLink4Description=https://datasheet.octopart.com:443/RMCF2512FT1K30-Stackpole-Electronics-datasheet-189104163.pdf?src-supplier=Master+Electronics, ComponentLink4URL=https://datasheet.octopart.com:443/RMCF2512FT1K30-Stackpole-Electronics-datasheet-189104163.pdf?src-supplier=Master+Electronics, ComponentLink5Description=https://datasheet.octopart.com:443/RMCF2512FT1K30-Stackpole-Electronics-datasheet-116606903.pdf?src-supplier=Master+Electronics, ComponentLink5URL=https://datasheet.octopart.com:443/RMCF2512FT1K30-Stackpole-Electronics-datasheet-116606903.pdf?src-supplier=Master+Electronics, ComponentLink6Description=https://datasheet.octopart.com:443/RMCF2512FT1K30-Stackpole-Electronics-datasheet-62091608.pdf?src-supplier=Stackpole+Electronics, ComponentLink6URL=https://datasheet.octopart.com:443/RMCF2512FT1K30-Stackpole-Electronics-datasheet-62091608.pdf?src-supplier=Stackpole+Electronics, ComponentLink7Description=https://datasheet.octopart.com:443/RMCF2512FT1K30-Stackpole-Electronics-datasheet-12534581.pdf?src-supplier=Stackpole+Electronics, ComponentLink7URL=https://datasheet.octopart.com:443/RMCF2512FT1K30-Stackpole-Electronics-datasheet-12534581.pdf?src-supplier=Stackpole+Electronics, ComponentLink8Description=https://datasheet.octopart.com:443/RMCF2512FT1K30-Stackpole-Electronics-datasheet-10788263.pdf?src-supplier=Stackpole+Electronics, ComponentLink8URL=https://datasheet.octopart.com:443/RMCF2512FT1K30-Stackpole-Electronics-datasheet-10788263.pdf?src-supplier=Stackpole+Electronics, ComponentLink9Description=http://sigma.octopart.com:80/15940719/materials_sheet/Stackpole-Electronics-RMCF2512FT1K30.pdf?src-supplier=Compliance+Statements, ComponentLink9URL=http://sigma.octopart.com:80/15940719/materials_sheet/Stackpole-Electronics-RMCF2512FT1K30.pdf?src-supplier=Compliance+Statements, ComponentLink10Description=http://sigma.octopart.com:80/141158212/rohs_statement/Stackpole-Electronics-RMCF2512FT1K30.pdf?src-supplier=Compliance+Statements, ComponentLink10URL=http://sigma.octopart.com:80/141158212/rohs_statement/Stackpole-Electronics-RMCF2512FT1K30.pdf?src-supplier=Compliance+Statements, ComponentLink11Description=http://sigma.octopart.com:80/141158211/reach_statement/Stackpole-Electronics-RMCF2512FT1K30.pdf?src-supplier=Compliance+Statements, ComponentLink11URL=http://sigma.octopart.com:80/141158211/reach_statement/Stackpole-Electronics-RMCF2512FT1K30.pdf?src-supplier=Compliance+Statements, Composition="Thick Film", Contact Plating=Tin, Depth=3.2mm, Features="Automotive AEC-Q200", Height=550µm, Length=6.2992mm, Lifecycle Status=Production, Military Standard=Not, Mounting Technology="Surface Mount", Number of Terminals=2, Number of Terminations=2, Packaging="Tape & Reel (TR)", Power Dissipation=1W, Power Rating=1W, Pricing="1=0.24, 10=0.126, 25=0.1008, 50=0.0864, 100=0.0751, 250=0.0638, 500=0.05728, 1000=0.0521 (USD)", Radiation Hardening=No, REACH SVHC=Yes, RoHS=Compliant, Schedule B="8533210045, 8533210045|8533210045|8533210045|8533210045|8533210045", Stock=10417, Supplier=DigiKey, Width=3.2mm
RD1 REG1 REG2 REG3 REG4 WD1: "WR-BHD Straight Male, Box Header, Through Hole, 2 Rows, 20 Contacts, 2.54mm Pitch", Color=Black, Contact Resistance=20mΩ, Current Rating=3A, Flammability Rating="UL94 V-0", Insulation Resistance=1GΩ, Manufacturer="Wurth Elektronik", Manufacturer Part Number=61202021621, Max Operating Temperature=105°C, Min Operating Temperature=-40°C, Operating Supply Voltage=250V, Supplier Part Number=732-2096-ND, Category="Headers and Wire Housings", ComponentLink1Description=https://datasheet.octopart.com:443/61202021621-W%C3%BCrth-Elektronik-datasheet-111087935.pdf?src-supplier=Upverter, ComponentLink1URL=https://datasheet.octopart.com:443/61202021621-W%C3%BCrth-Elektronik-datasheet-111087935.pdf?src-supplier=Upverter, ComponentLink2Description=https://datasheet.octopart.com:443/61202021621-Wurth-Elektronik-datasheet-168480024.pdf?src-supplier=Wurth+Elektronik, ComponentLink2URL=https://datasheet.octopart.com:443/61202021621-Wurth-Elektronik-datasheet-168480024.pdf?src-supplier=Wurth+Elektronik, ComponentLink3Description=https://datasheet.octopart.com:443/61202021621-W%C3%BCrth-Elektronik-datasheet-149523954.pdf?src-supplier=Farnell, ComponentLink3URL=https://datasheet.octopart.com:443/61202021621-W%C3%BCrth-Elektronik-datasheet-149523954.pdf?src-supplier=Farnell, ComponentLink4Description=https://datasheet.octopart.com:443/61202021621-W%C3%BCrth-Elektronik-Midcom-datasheet-10469446.pdf?src-supplier=Farnell, ComponentLink4URL=https://datasheet.octopart.com:443/61202021621-W%C3%BCrth-Elektronik-Midcom-datasheet-10469446.pdf?src-supplier=Farnell, ComponentLink5Description=https://datasheet.octopart.com:443/61202021621-W%C3%BCrth-Elektronik-Midcom-datasheet-5367532.pdf?src-supplier=element14+APAC, ComponentLink5URL=https://datasheet.octopart.com:443/61202021621-W%C3%BCrth-Elektronik-Midcom-datasheet-5367532.pdf?src-supplier=element14+APAC, Connector Type="Male Pin", Contact Gender=Male, Contact Material=Gold, Contact Plating=Gold, Gender=Male, Height=9.25mm, Housing Material=PBT, Insulation=Insulated, Insulation Material=PBT, Lead Pitch=2.54mm, Length=33.06mm, Mounting Technology="Through Hole", Number of Contacts=20, Number of Positions=20, Number of Rows=2, Orientation=Vertical, Pins=20, Pitch=2.54mm, Pricing="1=0.86, 10=0.839, 50=0.7732, 160=0.69213, 320=0.64375 (USD)", RoHS=Compliant, Row Spacing=2.54mm, Stock=12933, Supplier=DigiKey, Termination="Through Hole", Voltage Rating=250V, Voltage Rating (DC)=250V, Width=33.06mm

## Via types
v1: diameter 50, hole 28, Top Signal to Bottom Signal, 103 vias
v2: diameter 240, hole 126, Top Signal to Bottom Signal, 4 vias

## Nets (pads, with @x,y where several pads share a name; then routed paths per layer and width w, separated by ;. In a path a pad name is that pad's centre, name@x,y a point inside that pad or via, vN(x,y) a via of type N, cw(c..) or ccw(c..) an arc to the next point about the centre after c; other vN are vias at no path point)
+24V: RD1.1 RD1.2 RD1.3 RD1.4 REG1.1 REG1.2 REG1.3 REG1.4 REG2.1 REG2.2 REG2.3 REG2.4 REG3.1 REG3.2 REG3.3 REG3.4 REG4.1 REG4.2 REG4.3 REG4.4 WD1.1 WD1.2 WD1.3 WD1.4
Ab0: D5.1 D6.1 D7.1 D8.1 K5.1 K6.1 K7.1 K8.1 WD1.10 | length 7185.2
  Top Signal w16: v1(1535,3370) 1535,2782.69 1569.27,2748.42 1569.27,1730.73 v1(1575,1725) ; K6.1 2632.5,1527.5 2632.5,1731.5 v1(2635,1734) ; K8.1 2635,3220 2635,3370 v1(2640,3375) ; K5.1 v1(3540,1680) ; K7.1 3545,3220 3545,3370 v1(3550,3375)
  Bottom Signal w16: WD1.10 1252.5,2782.5 1532.5,2782.5 v1(1535,2785) ; v1(1535,3370) 1538,3367 2622.8,3367 2630.8,3375 v1(2640,3375) v1(3550,3375) ; v1(1575,1725) 2608.63,1725 2611.12,1727.49 2628.49,1727.49 v1(2635,1734) ; v1@2634.5,1734.5 2635,1735 2675,1695 3515.8,1695 3530.8,1680 v1(3540,1680)
  Bottom Signal w20: D5.1 2552.5,1615 2622.35,1545.15 2622.35,1532.65 K6.1 ; D7.1 2552.5,3305 2622.35,3235.15 2622.35,3222.65 K8.1 ; D6.1 3462.5,1615 3532.35,1545.15 3532.35,1532.65 K5.1 ; D8.1 3462.5,3305 3532.35,3235.15 3532.35,3222.65 K7.1
Ab1: D3.1 D4.1 K3.1 K4.1 WD1.12 | length 2913.9
  Top Signal w16: K4.1 v1(2330.48,2889.52) 2390,2830 2390,2721.37 2341.51,2672.88 2341.51,2653.51 v1(2335,2647) ; v1(3230,2895) 3235,2900 3235,3065 K3.1
  Bottom Signal w16: WD1.12 1779.26,2680 1809.26,2650 2332,2650 v1(2335,2647) ; v1(2330.48,2889.52) 2333.22,2892.26 3227.26,2892.26 v1(3230,2895)
  Bottom Signal w20: K4.1 2338.13,3061.36 2338.13,3034.37 2397.5,2975 D3.1 ; K3.1 3247.65,3062.35 3247.65,3049.85 3317.5,2980 D4.1
At0: D2.1 D11.1 D12.1 D13.1 D14.1 K2.1 K11.1 K12.1 K13.1 K14.1 WD1.6 | length 6401.5
  Top Signal w16: v1(1325,1395) 1325,2855.64 1299.5,2881.14 1299.5,2930.5 WD1.6 1325,3055 v1(1325,3145) ; v1(1685,1445) 1685,1447.5 1760,1522.5 K2.1 ; v1(2200,1445) 2202.5,1447.5 2202.5,1522.5 K12.1 ; v1(3035,1445) 3036.5,1445 3116.5,1525 K11.1
  Bottom Signal w16: v1(1325,1395) 1334.2,1395 1354.2,1415 1500,1415 1530,1445 v1(1685,1445) v1(2200,1445) v1(3035,1445) ; v1@1326,3146 v1(1325,3145) 2140,3145 K14.1 2262,3163 2300,3163 3068,3163 K13.1
  Bottom Signal w20: D2.1 1687.5,1635 1752.35,1570.15 1752.35,1532.65 K2.1 ; D11.1 2127.5,1615 2197.35,1545.15 2197.35,1532.65 K12.1 ; D13.1 2132.5,3305 2202.35,3235.15 2202.35,3222.65 K14.1 ; D12.1 3040.5,1615 3110.35,1545.15 3110.35,1532.65 K11.1 ; D14.1 3042.5,3305 3112.35,3235.15 3112.35,3222.65 K13.1
At1: D1.1 D9.1 D10.1 K1.1 K9.1 K10.1 WD1.8 | length 3378.7
  Top Signal w16: v1(1340,3715) 1340,3705.8 1368,3677.8 1368,2905.75 1356.45,2894.2 v1(1356.45,2885) ; v1(1455,3720) 1457.5,3722.5 1457.5,3912.5 K1.1 ; v1(1905,2890) 1907.5,2892.5 1907.5,3067.5 K10.1
  Bottom Signal w15: K10.1 K10.1@1910,3080
  Bottom Signal w16: WD1.8 1255,2885 v1(1356.45,2885) ; v1(1340,3715) 1342.5,3717.5 1452.5,3717.5 v1(1455,3720) ; v1@1365,2885 v1(1356.45,2885) ; v1(1905,2890) 1900,2885 v1(1356.45,2885) ; K10.1@1910,3080 1948,3118 2229.88,3118 2230.88,3117 2310.59,3117 2772.99,3117.01 K9.1
  Bottom Signal w20: K1.1 1467.65,3907.35 1467.65,3879.85 1537.5,3810 D1.1 ; K10.1 1917.65,3062.35 1917.65,3049.85 1987.5,2980 D9.1 ; K9.1 2827.65,3062.35 2827.65,3049.85 2897.5,2980 D10.1
CLK: RD1.15 REG1.15 REG2.15 REG3.15 REG4.15 WD1.15 | length 9717
  Top Signal w16: v1(1070,1400) 1070,2400 WD1.15 ; v1(1380,2535) 1380,2847.74 1401,2868.74 1401,3996 1418,4013 1418,4202.81 1405,4215.81 v1(1405,4355) ; REG3.15 v1(1775,1390) ; REG1.15 1854.5,4339.5 3085.5,4339.5 REG2.15 ; v1(3130,1390) 3132.5,1387.5 3132.5,1252.5 REG4.15 ; RD1.15 4385,2335 v1(4385,1390)
  Bottom Signal w16: v1(1070,1400) 1118,1352 1342.81,1352 1370.81,1380 1748.63,1380 1752.12,1383.49 1768.49,1383.49 v1(1775,1390) v1(3130,1390) v1(4385,1390) ; WD1.15 1200.5,2530.5 1375.5,2530.5 v1(1380,2535) ; v1(1405,4355) 1740,4355 REG1.15
GND: D1.2 D2.2 D3.2 D4.2 D5.2 D6.2 D7.2 D8.2 D9.2 D10.2 D11.2 D12.2 D13.2 D14.2 K1.8 K2.8 K3.8 K4.8 K5.8 K6.8 K7.8 K8.8 K9.8 K10.8 K11.8 K12.8 K13.8 K14.8 R1.2 R2.2 R3.2 R4.2 R5.2 R6.2 R7.2 R8.2 R9.2 R10.2 R11.2 R12.2 RD1.17 RD1.18 RD1.19 RD1.20 REG1.17 REG1.18 REG1.19 REG1.20 REG2.17 REG2.18 REG2.19 REG2.20 REG3.17 REG3.18 REG3.19 REG3.20 REG4.17 REG4.18 REG4.19 REG4.20 WD1.17 WD1.18 WD1.19 WD1.20 | length 2959.5
  Bottom Signal w20: R10.2 1114,1559 1130,1543 v1(1130,1445) ; R11.2 1109,2110 1125,2126 v1(1125,2180) ; v1(1245,1395) 1250.74,1400.74 1250.74,1421.74 1298,1469 R9.2 ; R12.2 1382,1839 1444.26,1901.26 1444.26,1924.26 v1(1450,1930) ; K2.8 1467.65,1532.65 1467.65,1570.15 1532.5,1635 D2.2 ; D1.2 1692.5,3810 1752.35,3869.85 1752.35,3907.35 K1.8 ; K12.8 1912.65,1532.65 1912.65,1555.15 1972.5,1615 D11.2 ; K14.8 1917.65,3222.65 1917.65,3245.15 1977.5,3305 D13.2 ; D9.2 2142.5,2980 2202.35,3039.85 2202.35,3062.35 K10.8 ; K6.8 2337.65,1532.65 2337.65,1555.15 2397.5,1615 D5.2 ; K8.8 2337.65,3222.65 2337.65,3245.15 2397.5,3305 D7.2 ; D3.2 2552.5,2975 2622.83,3045.33 2622.83,3061.36 K4.8 ; K11.8 2825.65,1532.65 2825.65,1555.15 2885.5,1615 D12.2 ; K13.8 2827.65,3222.65 2827.65,3245.15 2887.5,3305 D14.2 ; D10.2 3052.5,2980 3112.35,3039.85 3112.35,3062.35 K9.8 ; K5.8 3247.65,1532.65 3247.65,1555.15 3307.5,1615 D6.2 ; K7.8 3247.65,3222.65 3247.65,3245.15 3307.5,3305 D8.2 ; D4.2 3472.5,2980 3532.35,3039.85 3532.35,3062.35 K3.8 ; v1(3905,3890) R1.2 ; v1(3910,3170) R7.2 ; v1(3910,3405) 3976,3405 R5.2 ; v1(3910,3645) 3976,3645 R3.2 ; v1(4235,3165) 4311,3165 R8.2 ; v1(4240,3645) 4311,3645 R4.2 ; v1(4245,3410) R6.2 ; v1(4245,3890) R2.2
inter_bot: K1.4 K2.7 | length 1429.8
  Top Signal w16: K2.7 1508,1873 1508,2297 1460,2345 K1.4
inter_top: K1.3 K2.2 | length 1820.9
  Top Signal w16: v1(1630,3420) 1630,2265 1674,2221 1674,1911 K2.2
  Bottom Signal w16: K1.3 1462.5,3417.5 1627.5,3417.5 v1(1630,3420)
NetDb0_2: Db0.2 R2.1 | length 147.3
  Bottom Signal w20: R2.1 4084,3848 4142.53,3789.47 4142.53,3777.47 Db0.2
NetDb1_2: Db1.2 R4.1 | length 147.3
  Bottom Signal w20: R4.1 4084,3608 4142.53,3549.47 4142.53,3537.47 Db1.2
NetDb2_2: Db2.2 R6.1 | length 147.3
  Bottom Signal w20: R6.1 4084,3368 4142.53,3309.47 4142.53,3297.47 Db2.2
NetDb3_2: Db3.2 R8.1 | length 147.3
  Bottom Signal w20: R8.1 4084,3128 4142.53,3069.47 4142.53,3057.47 Db3.2
NetDt0_2: Dt0.2 R1.1 | length 147.3
  Bottom Signal w20: R1.1 3749,3848 3807.53,3789.47 3807.53,3777.47 Dt0.2
NetDt1_2: Dt1.2 R3.1 | length 147.3
  Bottom Signal w20: R3.1 3749,3608 3807.53,3549.47 3807.53,3537.47 Dt1.2
NetDt2_2: Dt2.2 R5.1 | length 147.3
  Bottom Signal w20: R5.1 3749,3368 3807.53,3309.47 3807.53,3297.47 Dt2.2
NetDt3_2: Dt3.2 R7.1 | length 147.3
  Bottom Signal w20: R7.1 3749,3128 3807.53,3069.47 3807.53,3057.47 Dt3.2
NetLD0_2: LD0.2 R9.1 | length 175.3
  Bottom Signal w20: LD0.2 1227.47,1607.47 1227.47,1630.47 1298,1701 R9.1
NetLD1_2: LD1.2 R10.1 | length 123.7
  Bottom Signal w20: R10.1 1104.5,1795.5 1215.5,1795.5 LD1.2
NetLD2_2: LD2.2 R11.1 | length 122.9
  Bottom Signal w20: R11.1 1103.5,1881.5 1216.5,1881.5 LD2.2
NetLD3_2: LD3.2 R12.1 | length 120.4
  Bottom Signal w20: LD3.2 1220.5,2070.5 1339.5,2070.5 R12.1
r0D0: REG1.5 REG2.5 REG3.5 REG4.5 WD1.5 | length 8633.4
  Top Signal w16: v1(1115,4005) 1115,3995.8 1100.5,3981.3 1100.5,3029.5 WD1.5 ; v1(2225,1090) 2225,1187.28 2275,1237.28 REG3.5 2279,1254 2279,1841.88 2283,1845.88 2283,1887.19 2293,1897.19 2293,1994.12 2279,2008.12 2279,3913.88 2255,3937.88 v1(2255,4010) 2255,4240 REG1.5 2354.5,4240.5 2354.5,4170.51 2385,4140 2595,4140 v1(2600,4145)
  Bottom Signal w16: v1(1115,4005) 1117.5,4007.5 2252.5,4007.5 v1(2255,4010) ; v1(2225,1090) 3675.63,1090 3685,1099.37 3685,1200 REG4.5 ; v1(2600,4145) 2604.5,4140.5 3555.5,4140.5 3585.5,4170.51 3585.5,4240.5 REG2.5
r0D1: REG1.7 REG2.7 REG3.7 REG4.7 WD1.7 | length 8549.3
  Top Signal w16: WD1.7 1072,2958 1072,4022.81 1109.19,4060 v1(1170,4060) ; v1(2125,1065) 2125.5,1065.5 2125.5,1176.45 2163.79,1214.73 2163.79,1215.92 2166.01,1218.14 2166.01,1228.29 2175,1237.28 2175,1409.19 2157,1427.19 2157,2476.09 2136,2497.09 2136,3546 2160,3570 v1(2160,4070) 2155.5,4074.5 2155.5,4240.5 REG1.7 ; v1(3485,1040) 3484.5,1040.5 3484.5,1199.5 REG4.7
  Bottom Signal w16: v1(1170,4060) 2140.8,4060 2150.8,4070 v1(2160,4070) ; v1(2125,1065) 2126.37,1065 2151.37,1040 v1(3485,1040) ; REG1.7 2254.5,4240.5 3485.5,4240.5 REG2.7
r0D2: REG1.9 REG2.9 REG3.9 REG4.9 WD1.9 | length 7989
  Top Signal w16: v1(1170,3645) 1360,3835 v1(1360,4105) ; REG3.9 2075,1262.72 2055,1282.72 v1(2055,4105) 2055,4240 REG1.9
  Bottom Signal w16: WD1.9 1100.5,2829.5 1100.5,3575.5 v1(1170,3645) ; v1(1360,4105) v1(2055,4105) ; REG3.9 2124.5,1299.5 3385.5,1299.5 REG4.9 ; REG1.9 2154.5,4339.5 3385.5,4339.5 REG2.9
r0D3: REG1.11 REG2.11 REG3.11 REG4.11 WD1.11 | length 8513.7
  Top Signal w16: v1(1185,3930) 1285,4030 1285,4095 v1(1375,4185) ; REG3.11 1975,1490.35 1990,1505.35 1990,3669.19 1958,3701.19 1958,3934.88 1955.5,3937.38 1955.5,4240.5 REG1.11 ; v1(3330,1342.5) 3332.5,1340 3332.5,1252.5 REG4.11 ; v1(3330,4385) 3332.5,4382.5 3332.5,4292.5 REG2.11
  Bottom Signal w16: WD1.11 1045,2785 1045,3870 1105,3930 v1(1185,3930) ; v1(1375,4185) 1381.29,4185 1412.79,4153.49 1444.01,4153.49 1457,4140.5 1925.5,4140.5 1955.5,4170.51 1955.5,4240.5 REG1.11 2100,4385 v1(3330,4385) ; REG3.11 2067.5,1342.5 v1(3330,1342.5)
r0LD: K2.3 LD0.1 REG1.13 | length 3478.5
  Top Signal w16: K2.3 1705,2080 1705,4120 1754.5,4169.5 1754.5,4209.49 1785.51,4240.5 1855.5,4240.5 REG1.13
  Top Signal w20: v1(1445,1630) 1808.28,1630 1820,1641.72 1820,1835.71 1760,1895.71 K2.3
  Bottom Signal w20: LD0.1 1350,1630 v1(1445,1630)
r0Q0: K7.3 K13.3 REG1.6 | length 1748.8
  Top Signal w16: v1(3095,4095) 3065,4065 3065,3770 K13.3
  Bottom Signal w16: REG1.6 2308.24,4186.76 2308.24,4119.37 2325.61,4102 2658.71,4102 2664.71,4108 3072.8,4108 3085.8,4095 v1(3095,4095) ; K13.3 3168,3667 3492,3667 K7.3
r0Q1: K7.6 K13.6 REG1.8 | length 1584.2
  Top Signal w16: K13.6 2870,3765 2870,4053 v1(2865,4058)
  Bottom Signal w16: REG1.8 2205,4115 2261.51,4058.49 2864.51,4058.49 v1(2865,4058) ; K13.6 2868,3763 3192,3763 K7.6
r0Q2: K8.3 K14.3 REG1.10 | length 1039.8
  Top Signal w16: v1(2105,3715) REG1.10
  Bottom Signal w16: v1(2105,3715) K14.3 2258,3667 2582,3667 K8.3
r0Q3: K8.6 K14.6 REG1.12 | length 1029.8
  Top Signal w16: v1(2005,3715) REG1.12
  Bottom Signal w16: v1(2005,3715) K14.6 1958,3763 2282,3763 K8.6
r0r1RDb0: K3.6 K7.2 | length 984.8
  Top Signal w16: K3.6 3492,2618 3492,3467 K7.2
r0r1RDb1: K3.3 K7.7 | length 994.7
  Top Signal w16: K3.3 3300,2630 3300,3455 K7.7
r0r1RDb2: K4.6 K8.2 | length 986
  Top Signal w16: K8.2 2582,3467 2582,2617.49 K4.6
r0r1RDb3: K4.3 K8.7 | length 1024.5
  Top Signal w16: K8.7 2425,3420 2425,2663.53 K4.3
r0r1RDt0: K9.6 K13.2 | length 984.8
  Top Signal w16: K9.6 3072,2618 3072,3467 K13.2
r0r1RDt1: K9.3 K13.7 | length 984.8
  Top Signal w16: K9.3 2772,2618 2772,3467 K13.7
r0r1RDt2: K10.6 K14.2 | length 984.8
  Top Signal w16: K10.6 2162,2618 2162,3467 K14.2
r0r1RDt3: K10.3 K14.7 | length 984.8
  Top Signal w16: K10.3 1862,2618 1862,3467 K14.7
r1LD: K2.4 LD1.1 REG2.13 | length 4588.3
  Top Signal w16: K2.4 1760,2415.8 1775,2430.8 v1(1775,2440) ; v1(2980,4065) 2989.2,4065 3018.33,4035.87 3019.93,4035.87 3035,4020.8 v1(3035,2440) ; v1(3195,4080) 3195,4089.2 3185.5,4098.7 3185.5,4240.5 REG2.13
  Top Signal w20: K2.4 1815,2170 v1(1815,1970)
  Bottom Signal w16: v1(1775,2440) v1(3035,2440) ; v1(2980,4065) 2989.2,4065 3002.2,4052 3157.8,4052 3185.8,4080 v1(3195,4080)
  Bottom Signal w20: LD1.1 1220,1703.28 1291.72,1775 1555,1775 1750,1970 v1(1815,1970)
r1Q0: K7.4 K13.4 REG2.6 | length 774.1
  Top Signal w16: K7.4 3635,4010 REG2.6
  Bottom Signal w16: K13.4 3168,3963 3259.88,3963 3307.88,3915 K7.4
r1Q1: K7.5 K13.5 REG2.8 | length 1059.5
  Top Signal w16: v1(3465,3865) 3465,3874.2 3480,3889.2 3480,4135 REG2.8
  Bottom Signal w16: K13.5 2868,3867 3140.11,3867 3186,3912.89 3237.89,3912.89 K7.5 3290,3865 v1(3465,3865)
r1Q2: K8.4 K14.4 REG2.10 | length 1473.6
  Top Signal w16: v1(3422,4015) 3428.5,4021.5 3428.5,4183.5 REG2.10
  Bottom Signal w16: K14.4 2212.11,3917.11 2264,3917.11 2309.89,3963 2582,3963 K8.4 2704,3989 3386.8,3989 3412.8,4015 v1(3422,4015)
r1Q3: K8.5 K14.5 REG2.12 | length 1716.9
  Top Signal w16: K8.5 v1(2330,4006) ; v1(3330,4040) 3332,4042 3332,4187 REG2.12
  Bottom Signal w16: K14.5 1958,3867 2282,3867 K8.5 ; v1(2330,4006) 2684.23,4006 2693.23,4015 3303.63,4015 3328.63,4040 v1(3330,4040)
r2LD: K2.6 LD2.1 REG3.13 | length 1568.7
  Top Signal w16: v1(1385.81,1334.19) 1380,1340 1380,1945 K2.6 ; v1(1870,1345) 1872.5,1342.5 1872.5,1252.5 REG3.13
  Bottom Signal w16: v1(1385.81,1334.19) 1391.22,1339.59 1864.59,1339.59 v1(1870,1345)
  Bottom Signal w20: LD2.1 1415.15,1985 1455.15,2025 K2.6
r2Q0: K5.3 K11.3 REG3.6 | length 2101.9
  Top Signal w16: REG3.6 2325.5,1200.5 2325.5,1452.62 2395,1522.12 v1(2395,1900) ; v1(3115,1910) 3116.5,1911.5 3116.5,2023.5 K11.3
  Bottom Signal w16: v1(2395,1900) 2400,1905 3110,1905 v1(3115,1910) ; K11.3 3166,1977 3492,1977 K5.3
r2Q1: K5.6 K11.6 REG3.8 | length 1873.9
  Top Signal w16: REG3.8 2183.99,1158.99 2183.99,1183.99 2225.5,1225.5 2225.5,1409.69 2253,1437.19 2253,1912 v1(2250,1915)
  Bottom Signal w16: v1(2250,1915) 2286,1951 2623.88,1951 2697.88,2025 K11.6 2866,2073 3192,2073 K5.6
r2Q2: K6.3 K12.3 REG3.10 | length 1478.5
  Top Signal w16: REG3.10 2075,1162.72 2124.5,1212.21 2124.5,1315.5 2105,1335 v1(2105,2025) ; K12.3@2197.82,2017.82 K12.3
  Bottom Signal w16: v1(2105,2025) 2259.39,2025 2304.9,1979.49 2307.62,1979.49 2310.12,1977 2349.88,1977 2397.88,2025 K6.3
r2Q3: K6.6 K12.6 REG3.12 | length 1391.5
  Top Signal w16: K12.6 1905,1892.88 1953,1844.88 1953,1505.12 1925.5,1477.62 1925.5,1199.5 REG3.12
  Bottom Signal w16: K12.6 1953,2073 2282,2073 K6.6
r2r3RDb0: K3.5 K5.2 | length 584.8
  Top Signal w16: K5.2 3492,1873 3492,2322 K3.5
r2r3RDb1: K3.4 K5.7 | length 590.6
  Top Signal w16: K5.7 3295,1880 3295,2315 K3.4
r2r3RDb2: K4.5 K6.2 | length 584
  Top Signal w16: K6.2 2582,1873 2582,2320.53 K4.5
r2r3RDb3: K4.4 K6.7 | length 583.6
  Top Signal w16: K6.7 2330,1957.12 2378,2005.12 2378,2321.49 K4.4
r2r3RDt0: K9.5 K11.2 | length 585.6
  Top Signal w16: K11.2 3070,1873 3070,2320 K9.5
r2r3RDt1: K9.4 K11.7 | length 585.6
  Top Signal w16: K11.7 2770,1873 2770,2320 K9.4
r2r3RDt2: K10.5 K12.2 | length 582.9
  Top Signal w16: K12.2 2205,1957.51 2224.49,1977 2224.88,1977 2253,2005.12 2253,2327 K10.5
r2r3RDt3: K10.4 K12.7 | length 586.8
  Top Signal w16: K12.7 1905,1836.91 1873.95,1867.95 1873.95,1891.86 1858,1907.81 1858,2004.12 1857,2005.12 1857,2317 K10.4
r3LD: K2.5 LD3.1 REG4.13 | length 3022.9
  Top Signal w16: v1(1612.27,2207.27) 1612.27,2198.07 1635,2175.34 v1(1635,1770) ; v1(3230,1745) 3175,1690 3175,1310 REG4.13
  Bottom Signal w16: LD3.1 1405,2170 K2.5 1585.34,2225 1603.07,2207.27 v1(1612.27,2207.27) ; v1(1635,1770) 2610.19,1770 2617.19,1777 3192.7,1777 3224.7,1745 v1(3230,1745)
r3Q0: K5.4 K11.4 REG4.6 | length 1675.7
  Top Signal w16: REG4.6 3643.99,1158.99 3643.99,1181.86 3645,1182.87 3645,1190 3684.5,1229.5 3684.5,1270.5 3645,1310 v1(3645,2220)
  Bottom Signal w16: K11.4 3166,2177 3492,2177 K5.4 3542.5,2222.5 3642.5,2222.5 v1(3645,2220)
r3Q1: K5.5 K11.5 REG4.8 | length 2012
  Top Signal w16: REG4.8 3585.5,1200.5 3585.5,1502.62 3590,1507.12 v1(3590,2285)
  Bottom Signal w16: K11.5 2866,2273 3202,2273 3240,2235 K5.5 3245,2230 3248.42,2233.42 3248.42,2253.42 3280,2285 v1(3590,2285)
r3Q2: K6.4 K12.4 REG4.10 | length 2485.1
  Top Signal w16: v1(3395,2335) 3395,1280 3385.5,1270.5 3385.5,1199.5 REG4.10
  Bottom Signal w16: K12.4 2253,2273 2582,2273 K6.4 2676.87,2271.87 2676.87,2272.5 2709.37,2305 3255,2305 3285,2335 v1(3395,2335)
r3Q3: K6.5 K12.5 REG4.12 | length 2582.3
  Top Signal w16: K6.5 2332.5,2222.5 2332.5,2127.5 v1(2335,2125) ; REG4.12 3285.5,1199.5 3285.5,1502.62 3345,1562.12 v1(3345,2100)
  Bottom Signal w16: K12.5 1953,2177 2282,2177 K6.5 ; v1(2335,2125) 2344.2,2125 2359.2,2110 3318.63,2110 3322.12,2106.51 3338.49,2106.51 v1(3345,2100)
RDb0: Db0.1 K3.7 RD1.6 | length 3422
  Top Signal w16: v1(3665,3970) 3603.46,3908.46 3603.46,2833.46 K3.7 3695,2615 v1(3695,1930) ; v1(4190,3985) 4190,3830 Db0.1
  Bottom Signal w16: v1(3665,3970) 3671,3976 4171.8,3976 4180.8,3985 v1(4190,3985) ; v1(3695,1930) RD1.6
RDb1: Db1.1 K3.2 RD1.8 | length 3348
  Top Signal w16: v1(3420,3590) 3420,3580.8 3435,3565.8 v1(3435,2775) 3438,2772 3438,2077 v1(3440,2075) ; v1(3650,3595) 4185,3595 Db1.1
  Bottom Signal w16: K3.2 3242.5,2772.5 3432.5,2772.5 v1(3435,2775) ; v1(3420,3590) 3422.5,3592.5 3647.5,3592.5 v1(3650,3595) ; v1(3440,2075) 4145,2075 RD1.8
RDb2: Db2.1 K4.7 RD1.10 | length 2934.4
  Top Signal w16: RD1.10 4110,2210 v1(4110,2820) 4315.63,2820 4325,2829.37 4325,3215 Db2.1
  Bottom Signal w16: K4.7 2681.47,2820 v1(4110,2820)
RDb3: Db3.1 K4.2 RD1.12 | length 2969.6
  Top Signal w16: v1(4015,2875) 4020,2870 v1(4020,2230) ; v1(4250,2865) Db3.1
  Bottom Signal w16: K4.2 2411.47,2850 3988.63,2850 4013.63,2875 v1(4015,2875) 4020,2870 4245,2870 v1(4250,2865) ; v1(4020,2230) RD1.12
RDt0: Dt0.1 K9.7 RD1.5 | length 3843.9
  Top Signal w16: v1(3210,3820) 3168,3778 3168,3050.12 3120,3002.12 K9.7 3120,2640 3176.51,2583.49 3176.51,1978.49 v1(3230,1925) ; v1(3655,3870) 3815,3870 Dt0.1
  Bottom Signal w16: v1(3210,3820) 3605,3820 v1(3655,3870) ; v1(3230,1925) 3274.5,1880.5 4240.5,1880.5 RD1.5
RDt1: Dt1.1 K9.2 RD1.7 | length 3734.9
  Top Signal w16: K9.2 2820,2666.15 2875,2611.15 2875,2160 v1(2880,2155) ; v1(3745,2005) 3742.5,2007.5 3742.5,2142.5 v1(3740,2145) 3740,3450 3760,3470 3855,3470 Dt1.1
  Bottom Signal w16: v1(2880,2155) 2886.51,2148.49 2902.88,2148.49 2906.37,2145 v1(3740,2145) ; v1(3745,2005) 3754.2,2005 3778.7,1980.5 4240.5,1980.5 RD1.7
RDt2: Dt2.1 K10.7 RD1.9 | length 3344.1
  Top Signal w16: Dt2.1 4065,3140 v1(4065,2690) 4065,2185 4169.5,2080.5 4240.5,2080.5 RD1.9
  Bottom Signal w16: K10.7 2290,2690 v1(4065,2690)
RDt3: Dt3.1 K10.2 RD1.11 | length 3629.2
  Top Signal w16: K10.2 1958,2722 1958,2531.3 1925,2498.3 v1(1925,2495) ; Dt3.1 3970,2995 v1(3970,2505) 3970,2200 v1(4050,2120)
  Bottom Signal w16: v1(1925,2495) 1930,2500 3965,2500 v1(3970,2505) ; v1(4050,2120) 4109.5,2179.5 4239.5,2179.5 RD1.11
WE: K1.2 WD1.13 | length 1295.2
  Top Signal w16: WD1.13 1200,2630 v1(1200,3580)
  Bottom Signal w16: v1(1200,3580) 1235,3615 K1.2
pads on no net: K1.5 K1.6 K1.7 RD1.13 RD1.14 RD1.16 REG1.14 REG1.16 REG2.14 REG2.16 REG3.14 REG3.16 REG4.14 REG4.16 WD1.14 WD1.16
copper on no net:
  other v2: 1200,1200 4240,1200 1200,4240 4240,4240

## Polygon pours and split planes (outlines as drawn)
GND on Bottom Signal "GND_L04_P000" (solid, remove dead copper, pour order 0): 1000,3990 cw(c1100,3990) 1100,4090 1250,4090 ccw(c1250,4190) 1350,4190 1350,4340 cw(c1450,4340) 1450,4440 3990,4440 cw(c3990,4340) 4090,4340 4090,4190 ccw(c4190,4190) 4190,4090 4340,4090 cw(c4340,3990) 4440,3990 4440,1450 cw(c4340,1450) 4340,1350 4190,1350 ccw(c4190,1250) 4090,1250 4090,1100 cw(c3990,1100) 3990,1000 1450,1000 cw(c1450,1100) 1350,1100 1350,1250 ccw(c1250,1250) 1250,1350 1100,1350 cw(c1100,1450) 1000,1450 1000,2725
GND on Top Signal "GND_L01_P001" (solid, remove dead copper, pour order 1): 1000,3990 cw(c1100,3990) 1100,4090 1250,4090 ccw(c1250,4190) 1350,4190 1350,4340 cw(c1450,4340) 1450,4440 3990,4440 cw(c3990,4340) 4090,4340 4090,4190 ccw(c4190,4190) 4190,4090 4340,4090 cw(c4340,3990) 4440,3990 4440,1450 cw(c4340,1450) 4340,1350 4190,1350 ccw(c4190,1250) 4090,1250 4090,1100 cw(c3990,1100) 3990,1000 1450,1000 cw(c1450,1100) 1350,1100 1350,1250 ccw(c1250,1250) 1250,1350 1100,1350 cw(c1100,1450) 1000,1450 1000,2725
GND on GND (split plane): 4347.84,4419.61 4355.61,4418.46 4363.22,4416.55 4370.61,4413.91 4377.71,4410.55 4384.44,4406.51 4390.75,4401.84 4396.57,4396.57 4401.84,4390.75 4406.51,4384.44 4410.55,4377.71 4413.91,4370.61 4416.55,4363.22 4418.46,4355.61 4419.61,4347.84 4419.97,4340.63 4419.9,4340 4419.9,1100 4419.97,1099.37 4419.61,1092.16 4418.46,1084.39 4416.55,1076.78 4413.91,1069.39 4410.55,1062.29 4406.51,1055.56 4401.84,1049.25 4396.57,1043.43 4390.75,1038.16 4384.44,1033.49 4377.71,1029.45 4370.61,1026.09 4363.22,1023.45 4355.61,1021.54 4347.84,1020.39 4340.63,1020.03 4340,1020.1 1100,1020.1 1099.37,1020.03 1092.16,1020.39 1084.39,1021.54 1076.78,1023.45 1069.39,1026.09 1062.29,1029.45 1055.56,1033.49 1049.25,1038.16 1043.43,1043.43 1038.16,1049.25 1033.49,1055.56 1029.45,1062.29 1026.09,1069.39 1023.45,1076.78 1021.54,1084.39 1020.39,1092.16 1020.03,1099.37 1020.1,1100 1020.1,2825 1020.1,4340 1020.03,4340.63 1020.39,4347.84 1021.54,4355.61 1023.45,4363.22 1026.09,4370.61 1029.45,4377.71 1033.49,4384.44 1038.16,4390.75 1043.43,4396.57 1049.25,4401.84 1055.56,4406.51 1062.29,4410.55 1069.39,4413.91 1076.78,4416.55 1084.39,4418.46 1092.16,4419.61 1099.37,4419.97 1100,4419.9 4340,4419.9 4340.63,4419.97
+24V on PWR (split plane): 4347.84,4419.61 4355.61,4418.46 4363.22,4416.55 4370.61,4413.91 4377.71,4410.55 4384.44,4406.51 4390.75,4401.84 4396.57,4396.57 4401.84,4390.75 4406.51,4384.44 4410.55,4377.71 4413.91,4370.61 4416.55,4363.22 4418.46,4355.61 4419.61,4347.84 4419.97,4340.63 4419.9,4340 4419.9,1100 4419.97,1099.37 4419.61,1092.16 4418.46,1084.39 4416.55,1076.78 4413.91,1069.39 4410.55,1062.29 4406.51,1055.56 4401.84,1049.25 4396.57,1043.43 4390.75,1038.16 4384.44,1033.49 4377.71,1029.45 4370.61,1026.09 4363.22,1023.45 4355.61,1021.54 4347.84,1020.39 4340.63,1020.03 4340,1020.1 1100,1020.1 1099.37,1020.03 1092.16,1020.39 1084.39,1021.54 1076.78,1023.45 1069.39,1026.09 1062.29,1029.45 1055.56,1033.49 1049.25,1038.16 1043.43,1043.43 1038.16,1049.25 1033.49,1055.56 1029.45,1062.29 1026.09,1069.39 1023.45,1076.78 1021.54,1084.39 1020.39,1092.16 1020.03,1099.37 1020.1,1100 1020.1,2825 1020.1,4340 1020.03,4340.63 1020.39,4347.84 1021.54,4355.61 1023.45,4363.22 1026.09,4370.61 1029.45,4377.71 1033.49,4384.44 1038.16,4390.75 1043.43,4396.57 1049.25,4401.84 1055.56,4406.51 1062.29,4410.55 1069.39,4413.91 1076.78,4416.55 1084.39,4418.46 1092.16,4419.61 1099.37,4419.97 1100,4419.9 4340,4419.9 4340.63,4419.97

## Silkscreen, mask and mechanical layers (free items; w line width, h text height)
Top Overlay:
  text "2026" at 3961,2434 h60 r90
  text "Vikram Procter" at 3964,1441 h60 r90
  text "RELAY MACHINE MUX4" at 3856,1439 h70 r90

## Text inside footprints (layer, text, board x,y; h text height)
Db0: Top Overlay "+" at 4320.08,3783.78 h31.5 r180
Db1: Top Overlay "+" at 4320.08,3543.78 h31.5 r180
Db2: Top Overlay "+" at 4320.08,3303.78 h31.5 r180
Db3: Top Overlay "+" at 4320.08,3063.78 h31.5 r180
Dt0: Top Overlay "+" at 3985.08,3783.78 h31.5 r180
Dt1: Top Overlay "+" at 3985.08,3543.78 h31.5 r180
Dt2: Top Overlay "+" at 3985.08,3303.78 h31.5 r180
Dt3: Top Overlay "+" at 3985.08,3063.78 h31.5 r180
K1: Top Overlay "*" at 1515,3890 h50
K2: Top Overlay "*" at 1705,1550 h50 r180
K3: Top Overlay "*" at 3295,3045 h50
K4: Top Overlay "*" at 2385.48,3044.01 h50
K5: Top Overlay "*" at 3485,1550 h50 r180
K6: Top Overlay "*" at 2575,1550 h50 r180
K7: Top Overlay "*" at 3485,3240 h50 r180
K8: Top Overlay "*" at 2575,3240 h50 r180
K9: Top Overlay "*" at 2875,3045 h50
K10: Top Overlay "*" at 1965,3045 h50
K11: Top Overlay "*" at 3063,1550 h50 r180
K12: Top Overlay "*" at 2150,1550 h50 r180
K13: Top Overlay "*" at 3065,3240 h50 r180
K14: Top Overlay "*" at 2155,3240 h50 r180
LD0: Top Overlay "+" at 1233.78,1429.92 h31.5 r90
LD1: Top Overlay "+" at 1233.78,1629.92 h31.5 r90
LD2: Top Overlay "+" at 1206.22,2055.08 h31.5 r270
LD3: Top Overlay "+" at 1206.22,2240.08 h31.5 r270